# Altium PCB EsoCore_Edge.PcbDoc (part 1 of 6)
Units mil, origin at the board's own origin, x right, y up, seen from the top; angles counter-clockwise.
Board outline 6732.28 x 3385.83 mil, 4 copper layers (Top Layer, Layer 1, Layer 2, Bottom Layer), stack 61.58 mil thick; 330 components, 239 nets, 1236 pads, 712 vias.
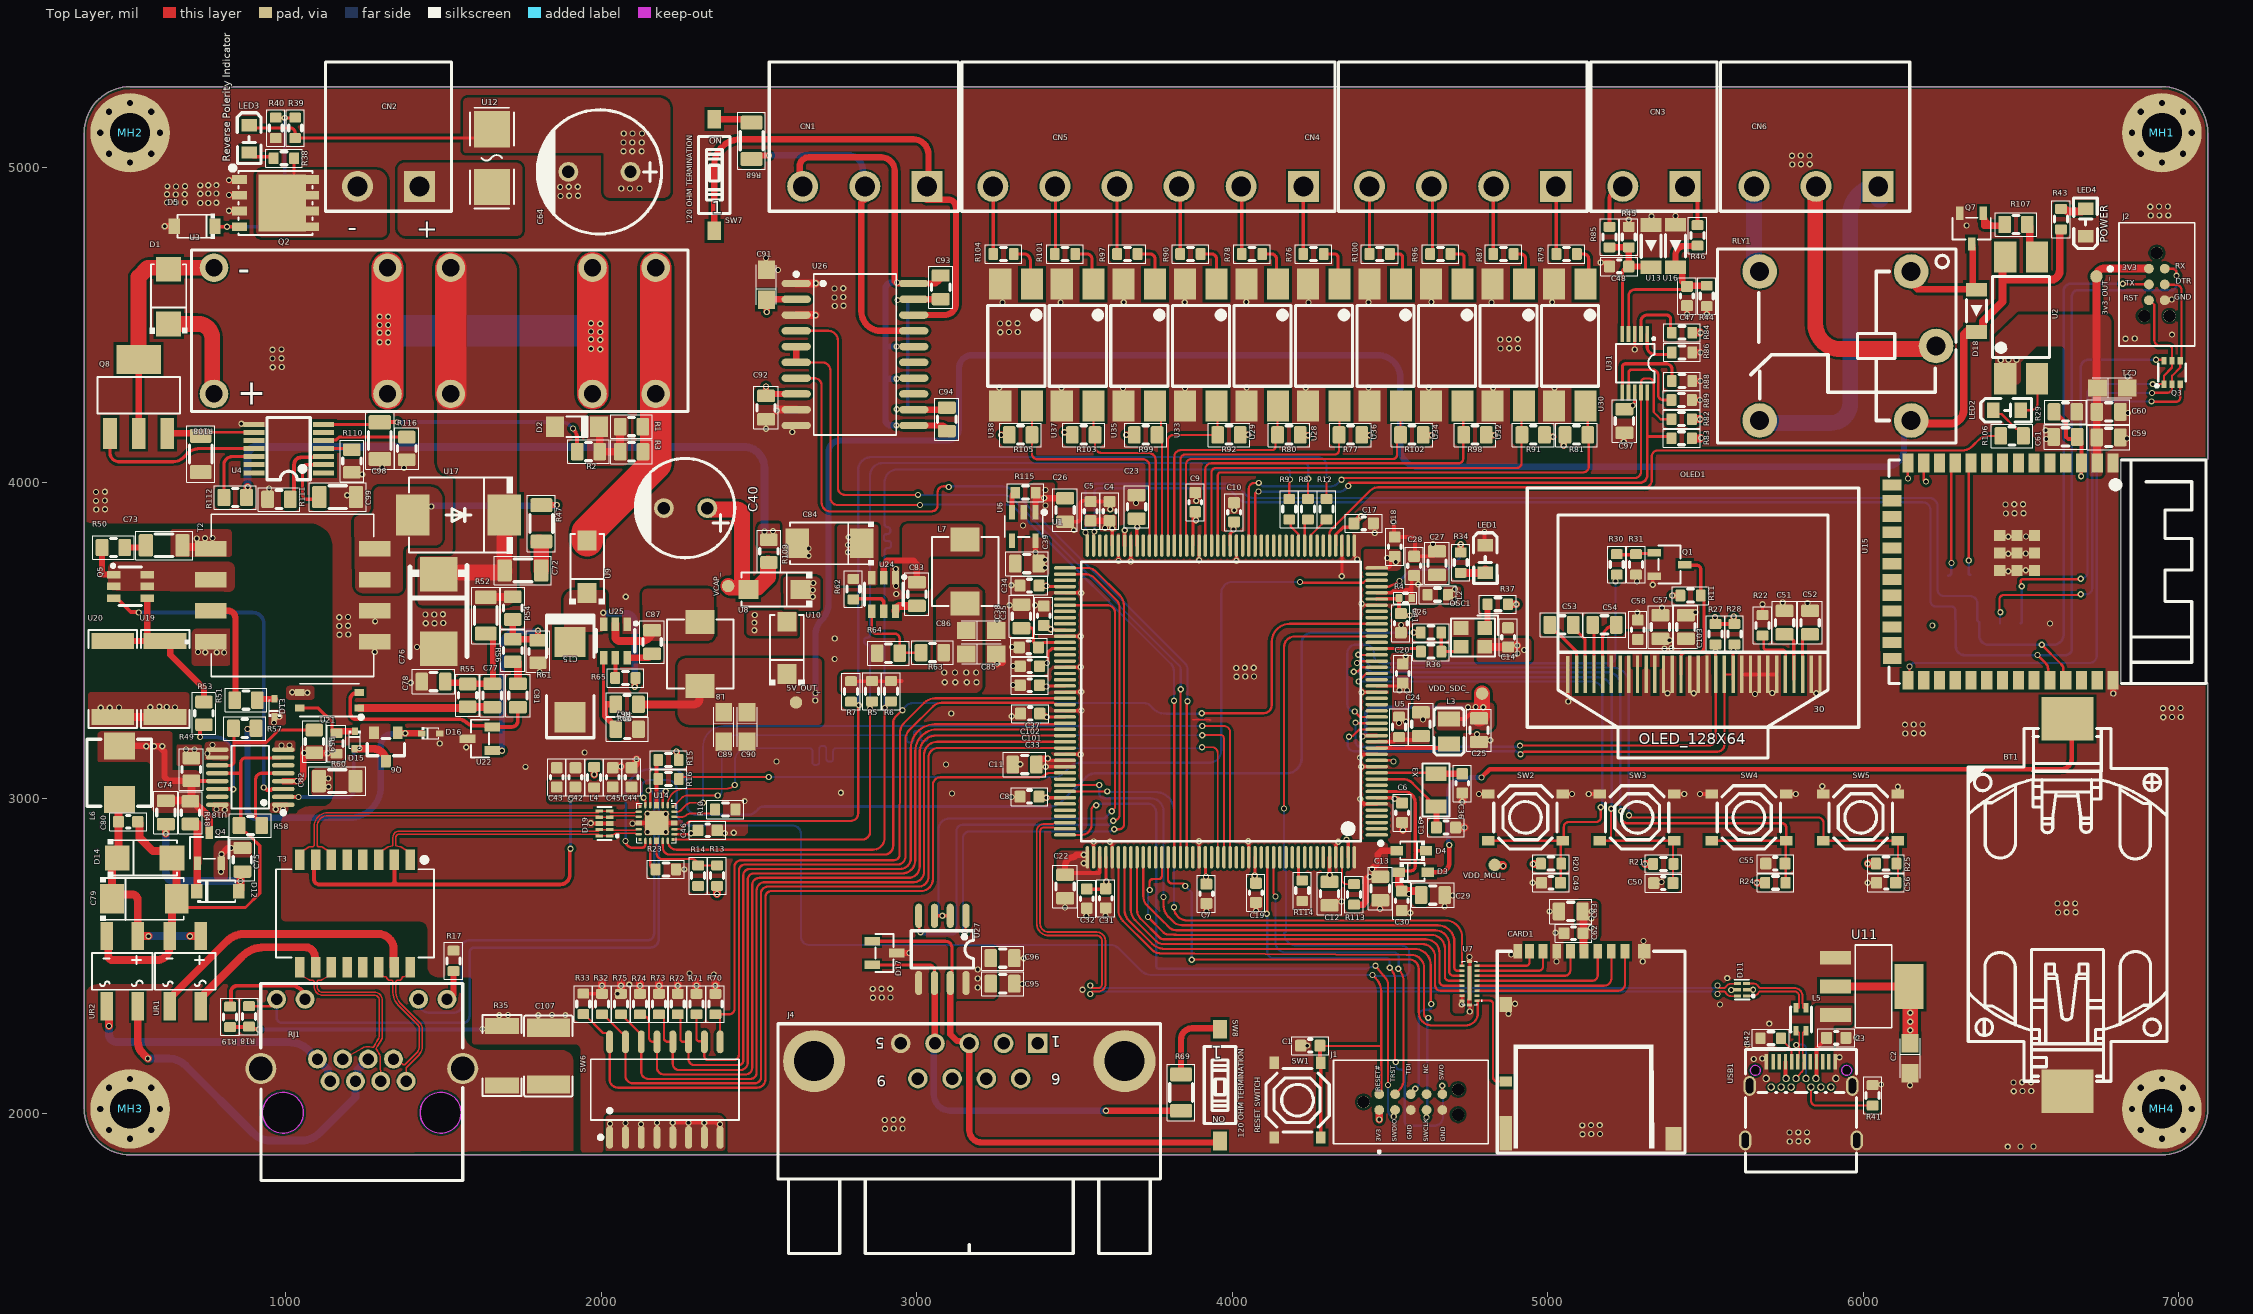
[diagram p0: Top Layer view]
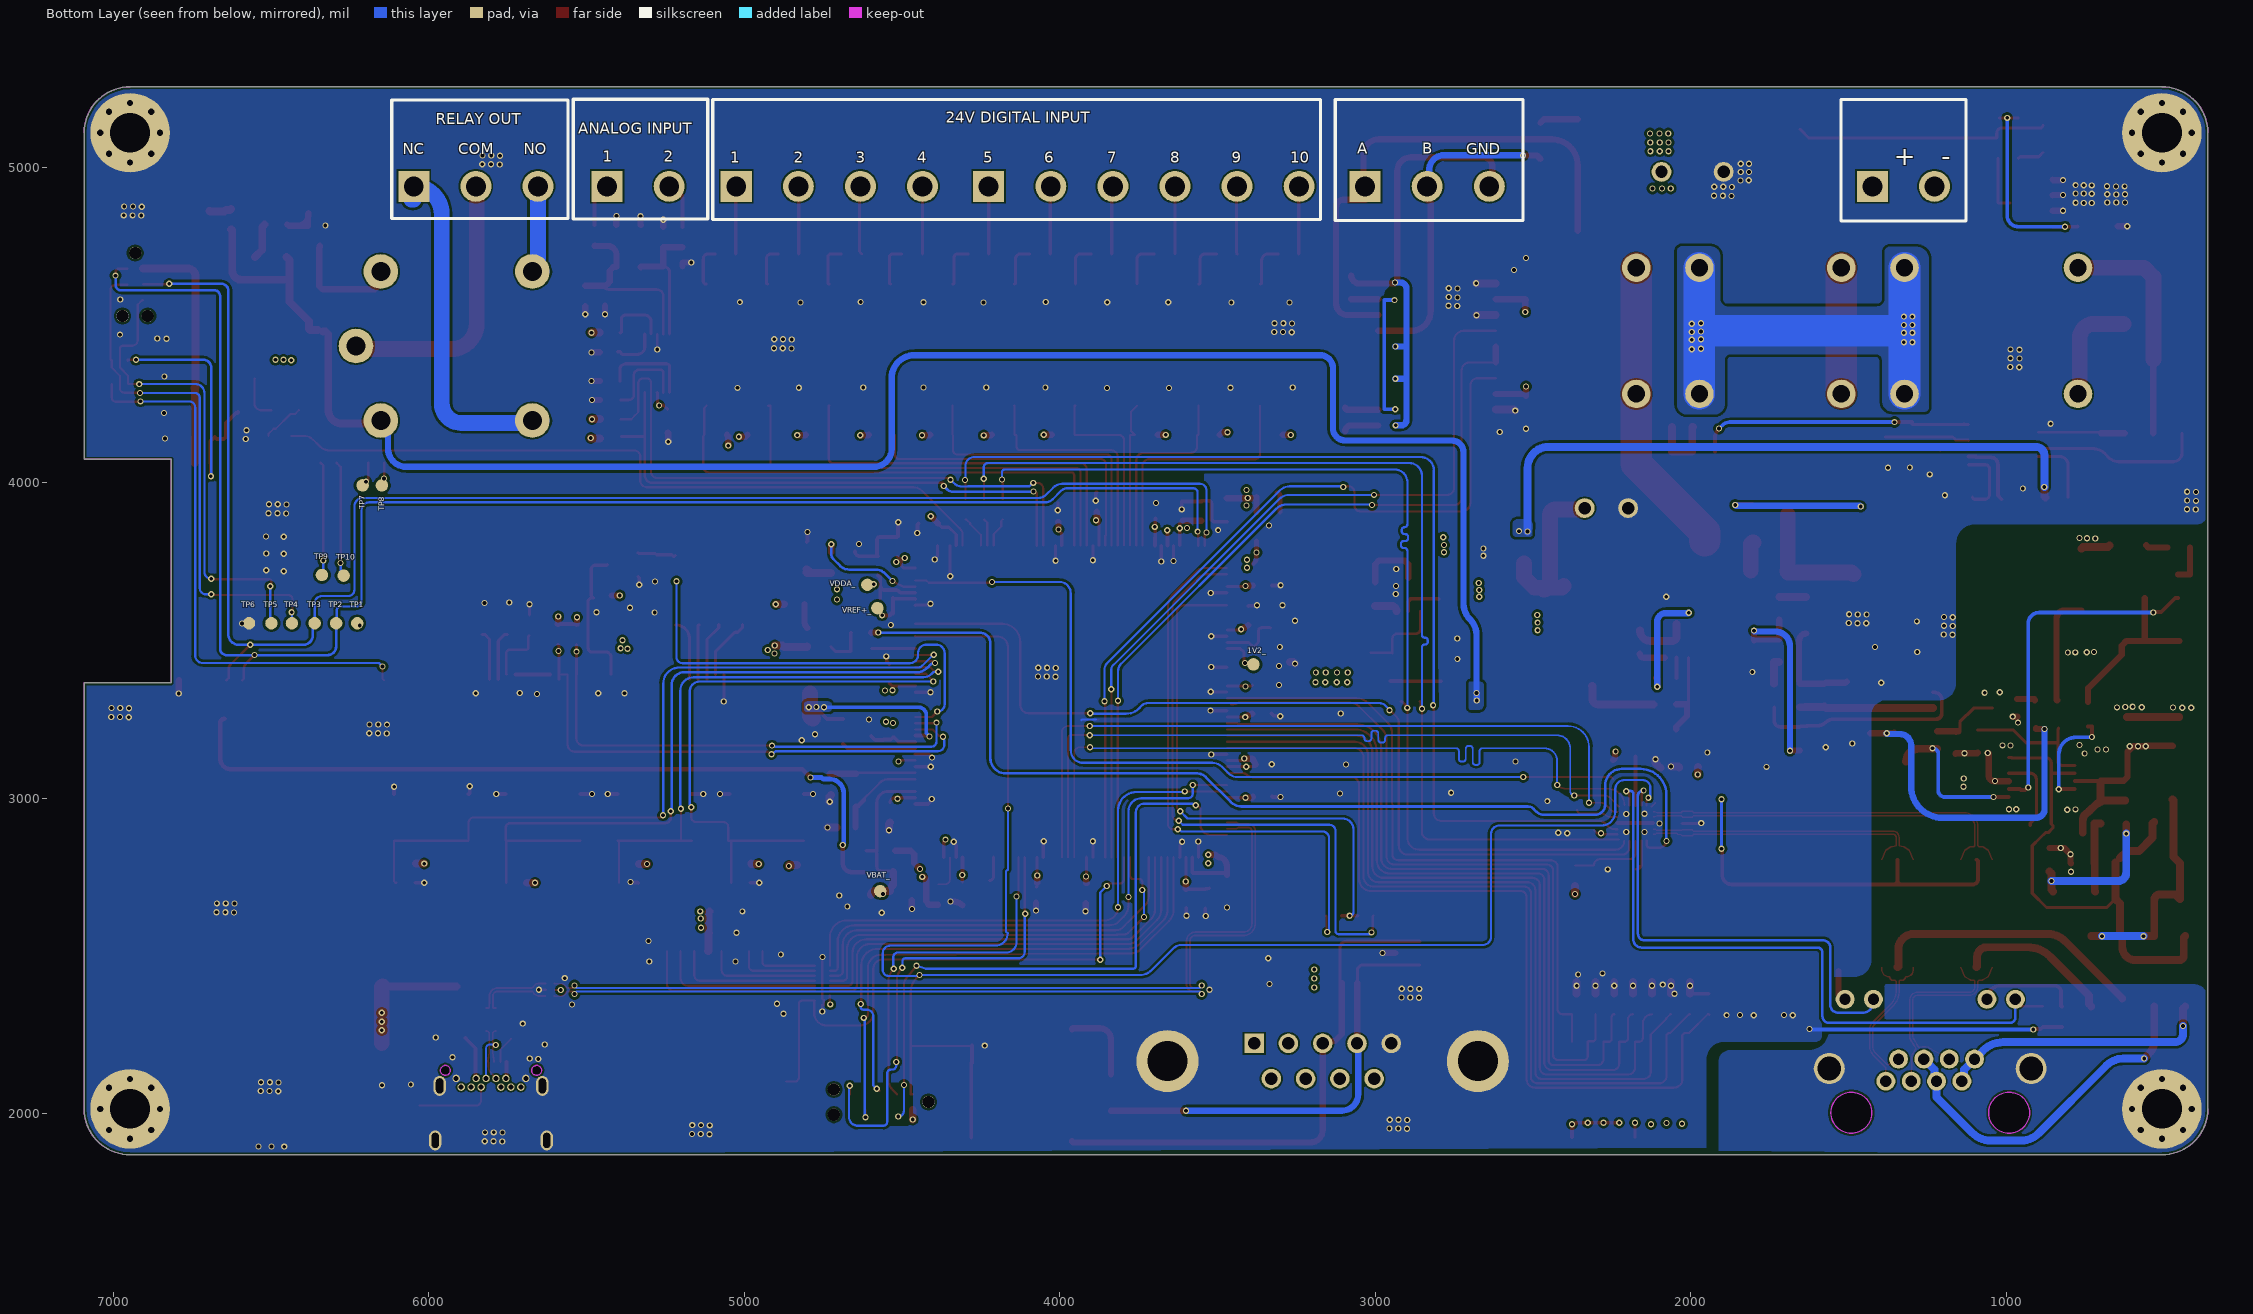
[diagram p1: Bottom Layer view, seen from below]
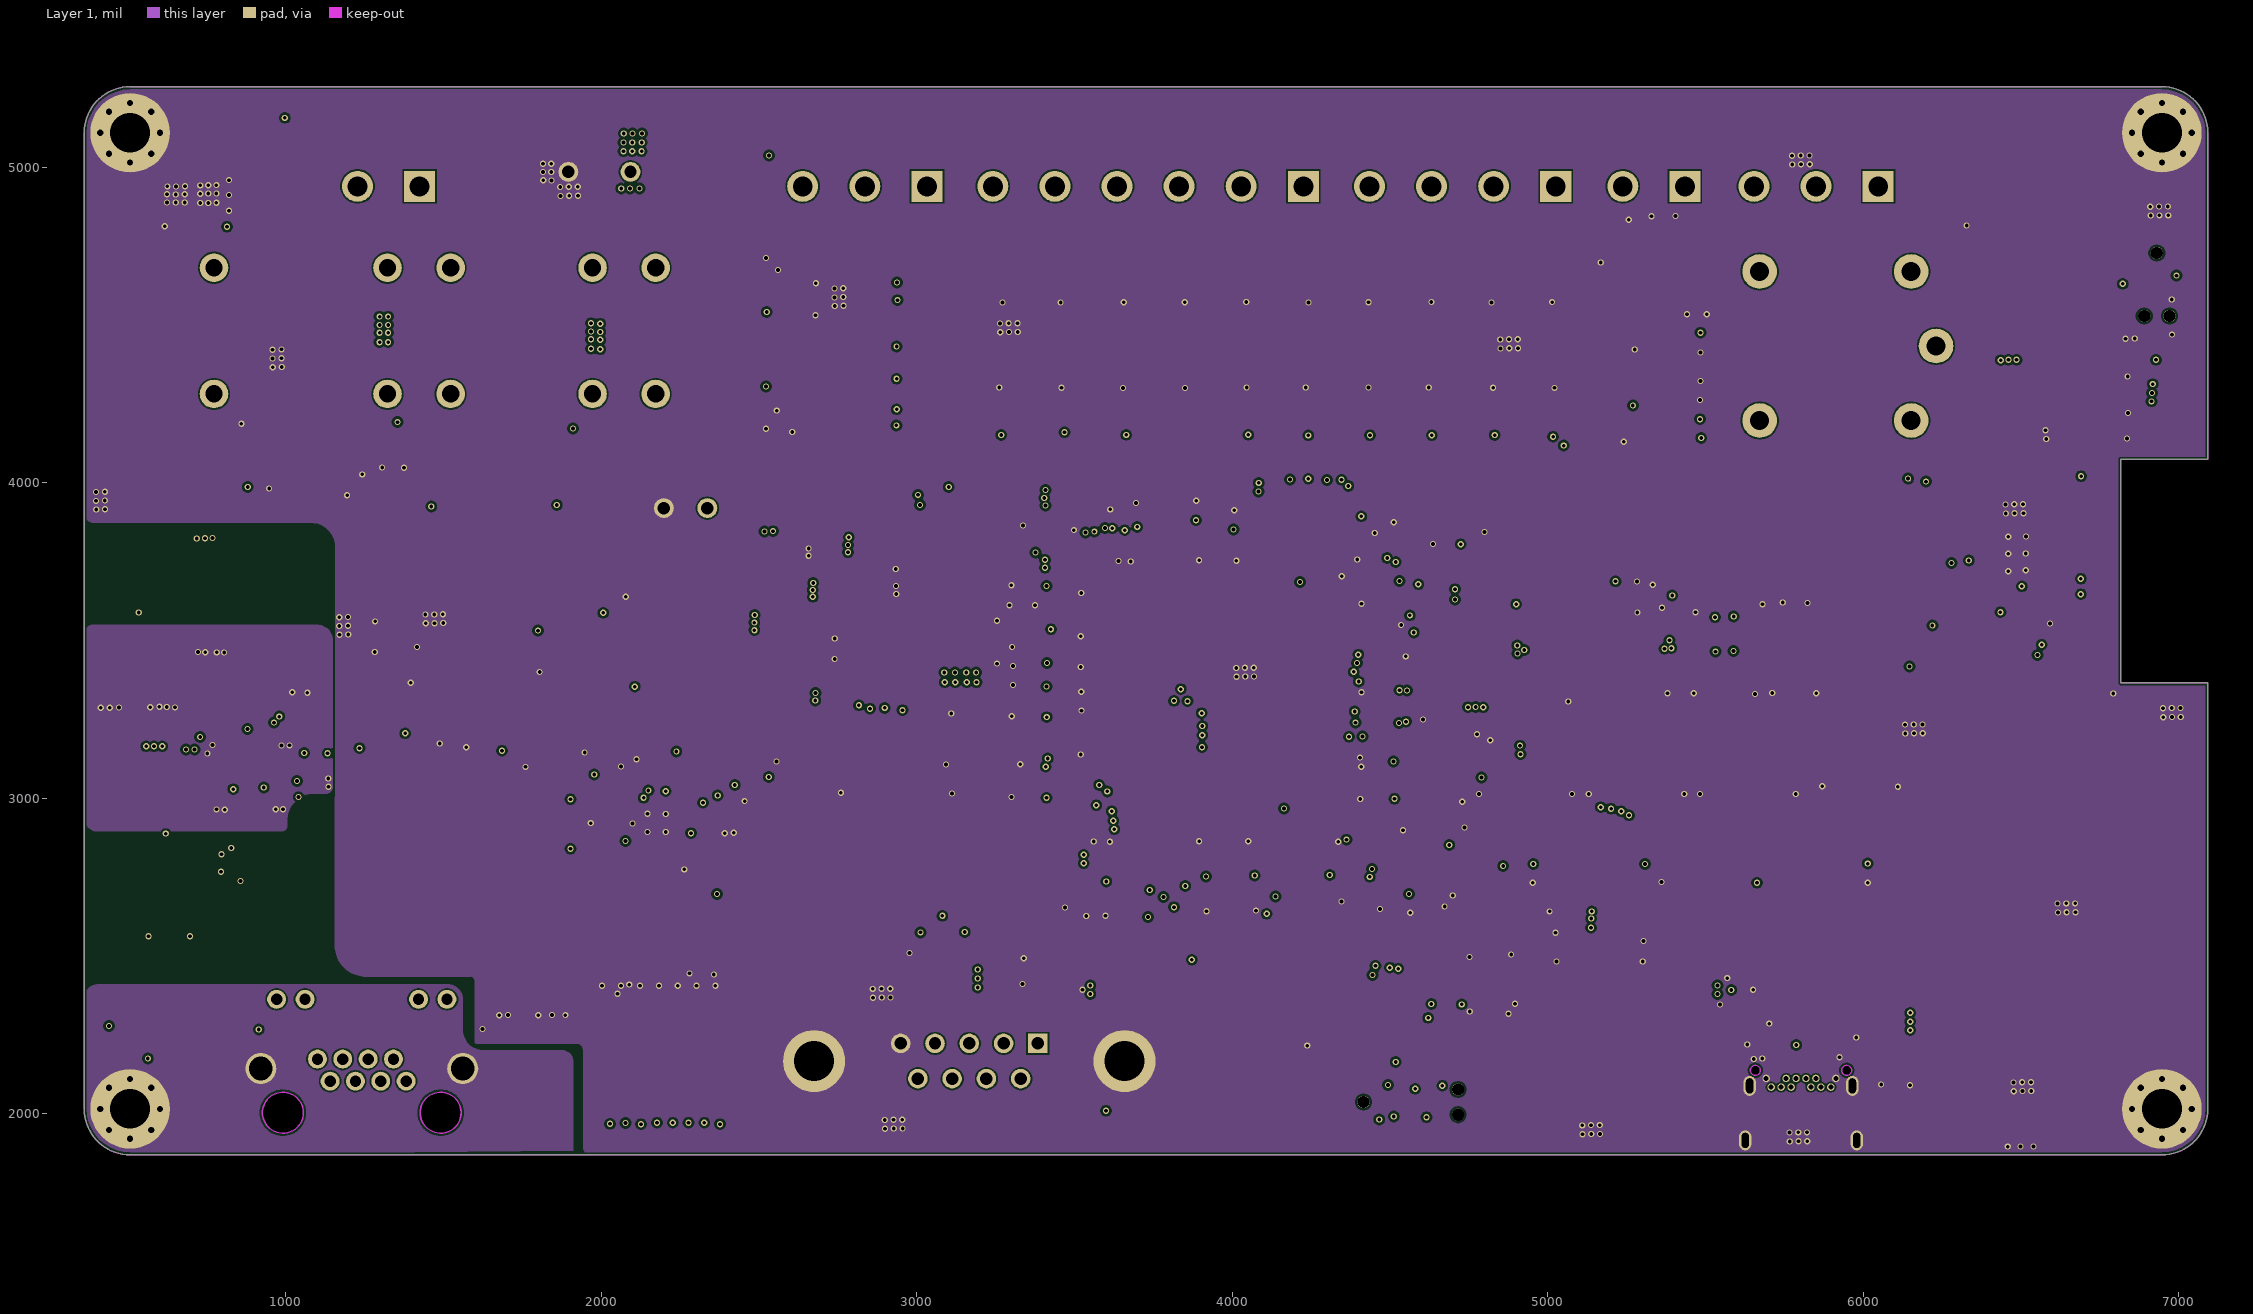
[diagram p2: Layer 1]
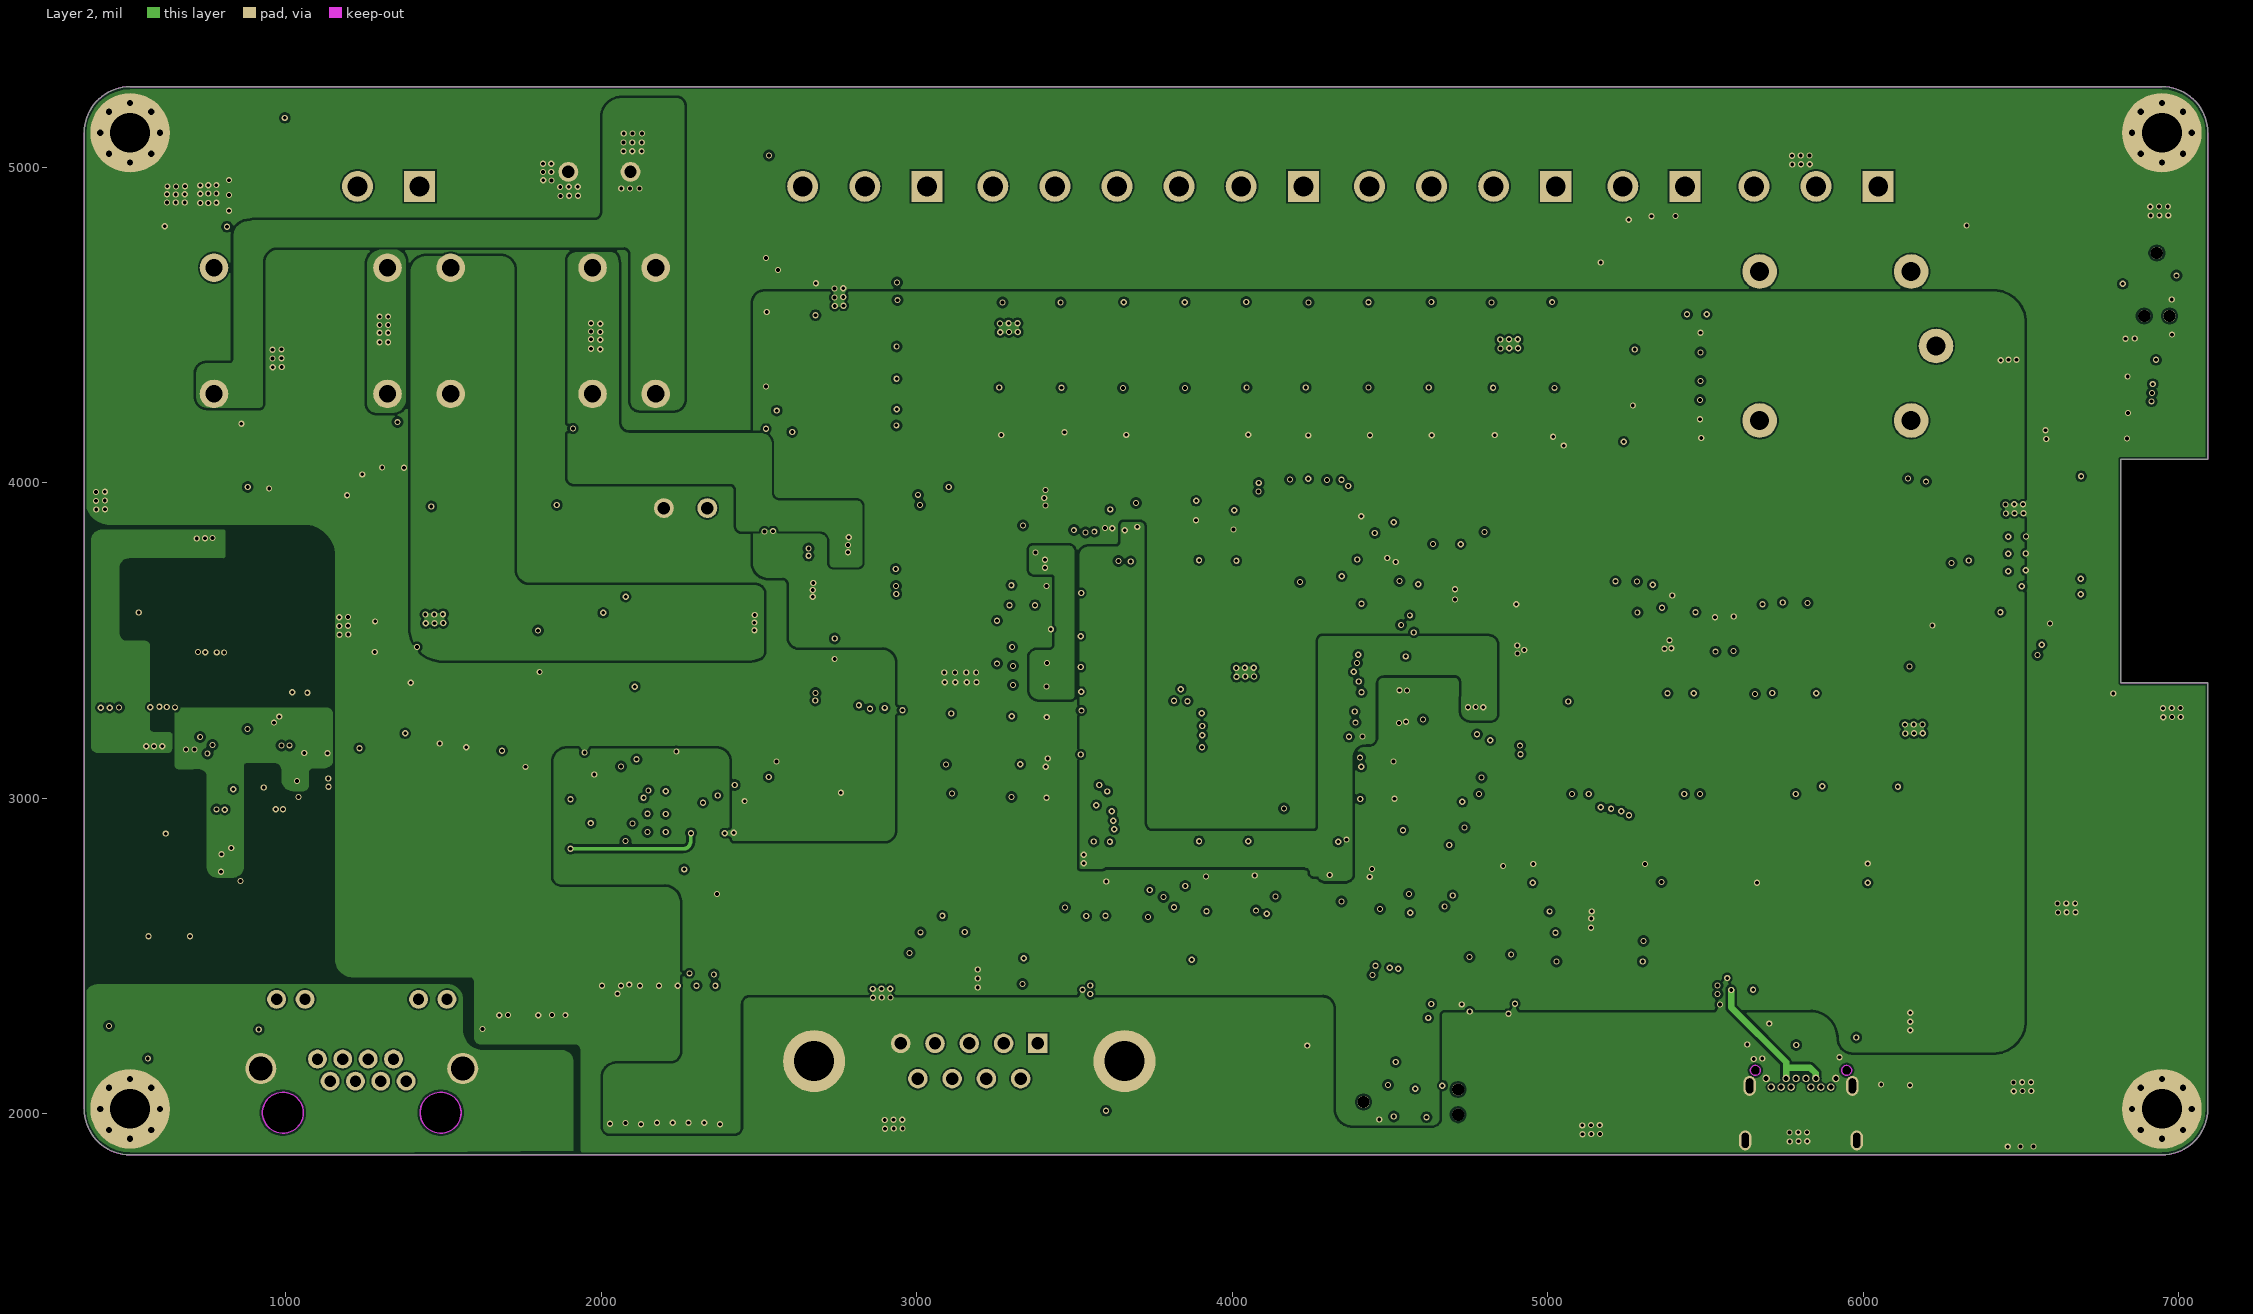
[diagram p3: Layer 2]
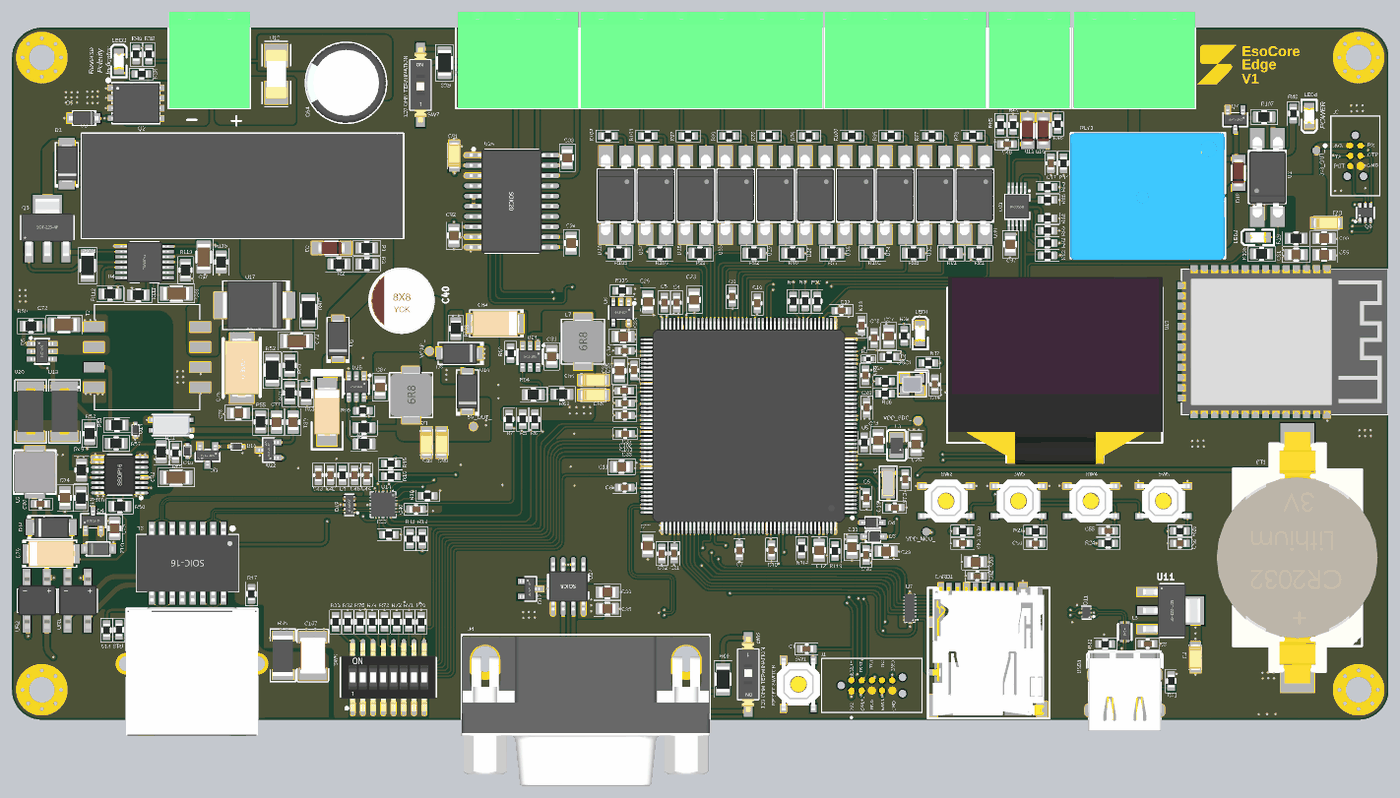
[diagram p8: 3D render of the assembled board from above, using the file's embedded part models]

## Layer stack, top to bottom
Top Solder: solder mask 0.4, Solder Resist, Dk 3.5
Top Layer: signal copper 1.38
Dielectric 2: prepreg 3.91, PP-006, Dk 4.1
Layer 1: signal copper 0.6
Dielectric 1: dielectric 49.8, FR-4, Dk 4.8
Layer 2: signal copper 0.6
Dielectric 3: prepreg 3.91, PP-006, Dk 4.1
Bottom Layer: signal copper 1.38
Bottom Solder: solder mask 0.4, Solder Resist, Dk 3.5

## Board outline
360.39,2015.51 360.39,5110 cw(c506.06,5110) 506.06,5255.67 6947,5255.67 cw(c6947,5110) 7092.67,5110 7092.67,4074.57 6817.08,4074.57 6817.08,3365.91 7092.67,3365.91 7092.67,2015.51 cw(c6947,2015.51) 6947,1869.84 506.06,1869.84 cw(c506.06,2015.51)

## Design rules (kind name [scope] priority, off if disabled: settings)
Clearance [All] p1: gap=7 ignorepadtopadclearanceinfootprint=TRUE except(5: Arc-Arc Arc-Track Track-Track THPad-Fill THPad-Poly THPad-Region; 8: Arc-Fill Arc-Poly Arc-Region Track-Fill Track-Poly Track-Region SMDPad-Fill SMDPad-Poly SMDPad-Region Via-Fill Via-Poly Via-Region Fill-Fill Fill-Poly Fill-Region Poly-Poly Poly-Region Region-Region)
ComponentClearance [All] p1: gap=10 collisioncheckmode=3 verticalgap=0 showdistances=FALSE donotcheckwithout3dbody=TRUE
DiffPairsRouting DiffPairsRouting_100 [InDifferentialPairClass('DIFF_100')] p1: maxlimit=5 minlimit=5 mostfreqgap=5 toplayer_minwidth=4.53 toplayer_maxwidth=4.53 toplayer_prefwidth=4.53 midlayer1_minwidth=3.11 midlayer1_maxwidth=3.11 midlayer1_prefwidth=3.11 midlayer2_minwidth=3.11 midlayer2_maxwidth=3.11 midlayer2_prefwidth=3.11 bottomlayer_minwidth=4.53 bottomlayer_maxwidth=4.53 bottomlayer_prefwidth=4.53 impedanceprofiledriven=TRUE impedanceprofileid={F4BAE591-1B0B-4594-972A-3B4D76FCA991} impedanceprofilevalue=100.000000 maxuncoupledlength=500
DiffPairsRouting DiffPairsRouting_90 [InDifferentialPairClass('USB_90')] p2: maxlimit=5 minlimit=5 mostfreqgap=5 toplayer_minwidth=5.86 toplayer_maxwidth=5.86 toplayer_prefwidth=5.86 midlayer1_minwidth=4.15 midlayer1_maxwidth=4.15 midlayer1_prefwidth=4.15 midlayer2_minwidth=4.15 midlayer2_maxwidth=4.15 midlayer2_prefwidth=4.15 bottomlayer_minwidth=5.86 bottomlayer_maxwidth=5.86 bottomlayer_prefwidth=5.86 impedanceprofiledriven=TRUE impedanceprofileid={0121417A-2B9E-4200-A5FA-08BD2ECC3B0E} impedanceprofilevalue=90.000000 maxuncoupledlength=500
HoleSize [All] p1: absolutevalues=TRUE maxlimit=2000 minlimit=1 maxpercent=80.000 minpercent=20.000
MinimumSolderMaskSliver [All] p1: minsoldermaskwidth=0
PlaneConnect [All] p1: planeconnectstyle=Direct reliefexpansion=20 reliefentries=4 reliefconductorwidth=10 reliefairgap=10
PolygonConnect [All] p1: connectstyle=Direct reliefconductorwidth=10 reliefentries=4 polygonreliefangle="90 Angle" airgapwidth=10
RoutingVias [All] p1: holewidth=11.81 width=19.68 viastyle="Through Hole" minholewidth=11.81 minwidth=19.68 maxholewidth=15.75 maxwidth=31.5
SilkToSilkClearance [All] p1: silktosilkclearance=0
SilkToSolderMaskClearance [IsPad] p1: minsilkscreentomaskgap=0 clearancetoexposedcopper=TRUE
SolderMaskExpansion SolderMaskExpansion_via [IsVia] p1: expansion=4 istentingtop=TRUE
SolderMaskExpansion [All] p2: expansion=4 istentingtop=FALSE
SupplyNets "Schematic Supply Nets_12" [InNet('+VIN2')] p1: voltage=0.000
SupplyNets "Schematic Supply Nets_10" [InNet('VBUS')] p2: voltage=0.000
SupplyNets "Schematic Supply Nets_8" [InNet('3V3')] p3: voltage=0.000
SupplyNets "Schematic Supply Nets_2" [InNet('GND_ISO')] p4: voltage=0.000
SupplyNets "Schematic Supply Nets_1" [InNet('VDD_ISO')] p5: voltage=0.000
SupplyNets "Schematic Supply Nets_23" [InNet('VDD_SDC')] p6: voltage=0.000
SupplyNets "Schematic Supply Nets_22" [InNet('1V2')] p7: voltage=0.000
SupplyNets "Schematic Supply Nets_21" [InNet('+24v')] p8: voltage=0.000
SupplyNets "Schematic Supply Nets_19" [InNet('EARTH_GND')] p9: voltage=0.000
SupplyNets "Schematic Supply Nets_6" [InNet('VDDA')] p10: voltage=0.000
SupplyNets "Schematic Supply Nets_4" [InNet('DSI_VDD12')] p11: voltage=0.000
SupplyNets "Schematic Supply Nets" [InNet('VBAT')] p12: voltage=0.000
SupplyNets "Schematic Supply Nets_18" [InNet('+VIN')] p13: voltage=0.000
SupplyNets "Schematic Supply Nets_11" [InNet('GND')] p14: voltage=0.000
SupplyNets "Schematic Supply Nets_7" [InNet('GND2')] p15: voltage=0.000
SupplyNets "Schematic Supply Nets_5" [InNet('+5V_OUT')] p16: voltage=0.000
SupplyNets "Schematic Supply Nets_3" [InNet('VREF+')] p17: voltage=0.000
Width [All] p1: maxlimit=200 minlimit=6 preferedwidth=7
23 further rules are at their usual default settings.

## Classes and differential pairs
differential pair class USB_90: D D1 USB
component class U_USB: C2 C3 D11 L5 R41 R42 U11 USB1
component class U_Tag: J1 J2
component class U_IO_ANALOG_DIGITAL: C47 C48 C97 CN3 CN4 CN5 CN6 D18 LED2 Q7 R44 R45 R46 R76 R77 R78 R79 R80 R81 R82 R83 R84 R85 R86 R87 R88 R89 R90 R91 R92 R96 R97 R98 R99 R100 R101 R102 R103 R104 R105 R106 R107 RLY1 U2 U13 U16 U28 U29 U30 U31 U32 U33 U34 U35 U36 U37 U38
component class U_FieldBUS_RTU: C91 C92 C93 C94 C95 C96 CN1 D17 J4 R32 R33 R68 R69 R70 R71 R72 R73 R74 R75 SW6 SW7 SW8 U26 U27
component class Root_page: MH1 MH2 MH3 MH4 U9 U10
component class U_MIcroSD_Card: C62 C63 CARD1 U7
component class U_24V_input: C64 CN2 D5 LED3 Q2 R38 R39 R40 U12
differential pair class DIFF_100: IRD ITD R RD T TD
component class U_UI: C49 C50 C51 C52 C53 C54 C55 C56 C57 C58 C103 OLED1 Q1 R11 R20 R21 R22 R24 R25 R27 R28 R30 R31 SW2 SW3 SW4 SW5
component class U_PROTECTION&SupplySwitching: C98 C99 D1 D2 Q8 R1 R2 R3 R108 R110 R111 R112 R116 U3 U4
component class U_POE: C72 C73 C74 C75 C76 C77 C78 C79 C80 C81 C82 D12 D13 D14 D15 D16 L6 Q4 Q5 Q6 R47 R48 R49 R50 R51 R52 R53 R54 R55 R56 R57 R58 R59 R60 R61 T2 U17 U18 U19 U20 U21 U22 UR1 UR2
component class U_MCU: 1V2_ BT1 C1 C4 C5 C6 C7 C8 C9 C10 C11 C12 C13 C14 C16 C17 C18 C19 C20 C22 C23 C24 C25 C26 C27 C28 C29 C30 C31 C32 C33 C34 C35 C36 C37 C38 C39 C41 C101 C102 D3 D4 L2 L3 LED1 OSC1 R4 R26 R34 R36 R37 R113 R114 R115 SW1 U1 U5 U6 VBAT_ VDD_MCU_ VDD_SDC_ VDDA_ VREF+_ X3
component class U_ETHERNET: C42 C43 C44 C45 C46 C107 D19 L4 R5 R6 R7 R8 R9 R10 R12 R13 R14 R15 R16 R17 R18 R19 R23 R35 RJ1 T3 U14
component class U_ESP32: C21 C59 C60 C61 Q3 R29 TP1 TP2 TP3 TP4 TP5 TP6 TP7 TP8 TP9 TP10 U15
component class U_Buck_converter: 3v3_OUT_ 5V_OUT_ C15 C40 C83 C84 C85 C86 C87 C89 C90 L7 L8 LED4 R43 R62 R63 R64 R65 R66 R67 R109 U8 U24 U25 VCAP_
differential pair USB: +USB_P -USB_N
differential pair D: +D_P -D_N
differential pair D1: +D1_P -D1_N
differential pair T: +T_P -T_N
differential pair R: +R_P -R_N
differential pair TD: +TD_P -TD_N
differential pair RD: +RD_P -RD_N

## Components (designator, comment, footprint, x,y, rotation, side; value= is the part's Value field where it differs from the comment)
1V2_ "TP" TP 3385.84,3424.58 r90 bottom
3v3_OUT_ "TP" TP 6739.54,4654.54 r180 top
5V_OUT_ "TP" TP 2617,3304 r90 top
BT1 "1060TR" BAT-SMD_1060TR 6648,2662 r180 top
C1 "100nF" C_0603 4249.23,2216.48 r180 top
C2 "22uF" CASE-A_3216 6149,2176 r270 top
C3 "100nF" C_0603 5913,2240 r0 top
C4 "100nF" C_0603 3611.48,3908.77 r90 top
C5 "100nF" C_0603 3551.48,3908.77 r90 top
C6 "100nF" C_0603 4538,2956 r270 top
C7 "100nF" C_0603 3917.52,2699.26 r270 top
C8 "100nF" C_0603 3359,3006 r180 top
C9 "100nF" C_0603 3883,3937 r90 top
C10 "100nF" C_0603 4006,3905 r90 top
C11 "1uF" C_0805 3343.62,3107.19 r0 top
C12 "4.7uF" C_0805 4308,2700 r90 top
C13 "4.7uF" C_0805 4469,2716 r90 top
C14 "10uF" C_0603 4874.9,3508.6 r90 top
C15 "10uF" CASE-C_6032 1901,3376 r90 top
C16 "18pF" C_0603 4676,2907 r0 top
C17 "100nF" C_0603 4415,3871 r0 top
C18 "100nF" C_0603 4515.48,3795.77 r90 top
C19 "100nF" C_0603 4074.52,2702.26 r270 top
C20 "100nF" C_0603 4541,3394 r90 top
C21 "22uF" CASE-A_3216 6790,4301 r0 top
C22 "4.7uF" C_0805 3469.81,2722.62 r90 top
C23 "4.7uF" C_0805 3697,3922 r270 top
C24 "4.7uF" C_0805 4598,3233 r270 top
C25 "10uF" C_0805 4782,3218 r90 top
C26 "10uF" C_0805 3470,3916 r90 top
C27 "1uF" C_0805 4649.19,3743.57 r270 top
C28 "100nF" C_0603 4577,3735.19 r90 top
C29 "1uF" C_0805 4634,2693 r180 top
C30 "100nF" C_0603 4537,2677 r270 top
C31 "100nF" C_0603 3598.27,2684.75 r270 top
C32 "100nF" C_0603 3538.27,2683.75 r270 top
C33 "100nF" C_0603 3361,3269 r180 top
C34 "100nF" C_0603 3359,3675 r180 top
C35 "100nF" C_0603 3403,3577 r90 top
C36 "18pF" C_0603 4728.82,3048.96 r270 top
C37 "100nF" C_0603 3357,3479 r180 top
C38 "2.2uF" C_0805 3331.73,3574.82 r270 top
C39 "4.7uF" C_0805 3351,3744 r0 top
C40 "20F" CAP-TH_BD8.0-P3.50-D0.6-FD 2267,3920 r180 top
C41 "100nF" C_0603 4534,3557 r270 top
C42 "100nF" C_0603 1918.26,3064.67 r90 top
C43 "100nF" C_0603 1859.26,3064.67 r90 top
C44 "470pF" C_0603 2095.11,3068.16 r270 top
C45 "100nF" C_0603 2036.59,3064.67 r90 top
C46 "100nF" C_0603 2335,2898.5 r0 top
C47 "22nF" C_0603 5442,4590.77 r90 top
C48 "22nF" C_0603 5224.8,4685.6 r0 top
C49 "100nF" C_0603 5008.77,2731.74 r0 top
C50 "100nF" C_0603 5365,2730.74 r0 top
C51 "4.7uF" C_0805 5751,3555 r270 top
C52 "2.2uF" C_0805 5832,3555 r270 top
C53 "1uF" C_0805 5045.62,3550.19 r0 top
C54 "1uF" C_0805 5182,3550 r0 top
C55 "100nF" C_0603 5720,2792.52 r0 top
C56 "100nF" C_0603 6071,2731.74 r0 top
C57 "1uF" C_0805 5357,3545 r90 top
C58 "100nF" C_0603 5285,3536.06 r270 top
C59 "10uF" C_0805 6776,4144 r180 top
C60 "100nF" C_0805 6776,4225 r180 top
C61 "100nF" C_0805 6643.26,4145.84 r0 top
C62 "100nF" C_0603 5083.41,2573 r180 top
C63 "2.2uF" C_0805 5075.02,2641.77 r0 top
C64 "470uF" CAP-TH_BD10.0-P5.00-D0.6-FD_1 1993.8,4985.9 r180 top
C72 "470pF" C_1206 1752,3722 r180 top
C73 "68pF" C_1206 613.26,3802.37 r0 top
C74 "1uF" C_0805 619,2957 r90 top
C75 "4.7uF" C_0805 862,2803 r270 top
C76 "330uF" CASE-D_7343 1484,3592 r90 top
C77 "33nF" C_0805 1654,3328 r90 top
C78 "1uF" C_0805 1470,3370 r0 top
C79 "4.7uF" CAP-SMD_L6.0-W3.2-R-RD 551,2681 r180 top
C80 "100nF" C_0603 498,2925 r0 top
C81 "27nF" C_0805 1735,3328 r90 top
C82 "2.2nF_AC_YCAP" C_1206 1162,3055 r0 top
C83 "100nF" C_0805 3000.19,3645.38 r270 top
C84 "4.7uF" CAP-SMD_L6.0-W3.2-R-RD 2723.36,3808 r0 top
C85 "22uF" CASE-A_3216 3204,3458 r0 top
C86 "22uF" CASE-A_3216 3204,3532 r0 top
C87 "100nF" C_0805 2161.19,3493.38 r270 top
C89 "22uF" CASE-A_3216 2387.9,3226.17 r270 top
C90 "22uF" CASE-A_3216 2461.9,3226.17 r270 top
C91 "22uF" CASE-A_3216 2523,4628.24 r90 top
C92 "100nF" C_0805 2521.81,4240.62 r90 top
C93 "100nF" C_0805 3076,4618 r270 top
C94 "100nF" C_0805 3094.81,4203.43 r90 top
C95 "100nF" C_0805 3270,2412 r180 top
C96 "100nF" C_0805 3270,2493 r180 top
C97 "100nF" C_0805 5243,4198 r90 top
C98 "10uF" C_1206 1297.41,4133.17 r90 top
C99 "4.7uF" C_1206 1164.78,3954.77 r180 top
C101 "100nF" C_0603 3360,3359 r180 top
C102 "100nF" C_0603 3360,3419 r180 top
C103 "10uF" C_0805 5438,3540.95 r270 top
C107 "4.7nF" C1812 1832,2183 r90 top
CARD1 "DM3AT-SF-PEJM5" SD-SMD_DM3AT-SF-PEJM5 5133,2218 r0 top locked
CN1 "XY2500R-A-5.00-3P" CONN-TH_XY2500R-A-5.00-3P 2835.15,4940 r180 top
CN2 "XY2500R-A-5.00-2P" CONN-TH_XY2500R-A-5.00-2P 1325.42,4940 r180 top
CN3 "XY2500R-A-5.00-2P" CONN-TH_XY2500R-A-5.00-2P 5336.42,4940 r180 top
CN4 "XY2500R-A-5.00-4P" CONN-TH_XY2500R-A-5.00-4P 4730.27,4940 r180 top
CN5 "XY2500R-A-5.00-6P" CONN-TH_XY2500R-A-5.00-6P 3733.13,4940 r180 top
CN6 "XY2500R-A-5.00-3P" CONN-TH_XY2500R-A-5.00-3P 5850.85,4940 r180 top
D1 "ES1D-E3/61T" SMA_L4.3-W2.6-LS5.2-RD 628,4590.61 r90 top
D2 "BZV55C2V0" SOD-80_L3.5-W1.5-RD 1923,4178 r180 top
D3 "BAT54WS-7-F" SOD-323_L1.8-W1.3-LS2.5-RD 4574,2766.01 r0 top
D4 "BAT54WS-7-F" SOD-323_L1.8-W1.3-LS2.5-RD 4568,2834 r180 top
D5 "MMSZ5245BT1G" SOD-123_L2.7-W1.6-LS3.7-RD 710.7,4813.4 r180 top
D11 "USBULC6-2M6" SON-6_L1.4-W1.0-P0.50-TL_USBULC6-2M6 5615.92,2393.25 r270 top
D12 "BZT52C8V2" SOD-123_L2.8-W1.8-LS3.7-RD 784,2705 r0 top
D13 "BAS516,115" SOD-523F_L1.2-W0.8-LS1.7-RD 964,3287 r90 top
D14 "SMAJ58A" SMA_L4.3-W2.6-LS5.2-RD 552,2811 r0 top
D15 "BAS516,115" SOD-523F_L1.2-W0.8-LS1.7-RD 1218.2,3185 r270 top
D16 "BAS516,115" SOD-523F_L1.2-W0.8-LS1.7-RD 1459,3206 r0 top
D17 "SP0502BAHTG" SOT-23-3_L2.9-W1.3-P1.90-LS2.4-BR 2897.37,2509.4 r180 top
D18 "LL4148" LL-34_L3.5-W1.5-RD 6359,4545 r90 top
D19 "TPD4E05U06DQAR" USON-10_L2.5-W1.0-P0.50-BL 2010.25,2920.35 r90 top
J1 "TC2050-IDC-NL" TAG-CONNECT_TC2050-IDC-NL 4466,2012 r90 top
J2 "TC2030-IDC-NL" TAG_TC2030-IDC-NL 6931,4629 r270 top
J4 "DS1037-09FNAKT74-0CC" DSUB-TH_DS1037-09FNAKT74-0CC 3166.34,2167.09 r270 top
L2 "FCM1608KF-601T03" R_0603 4651,3646 r0 top
L3 "2.2uH" L0806 4687,3212 r270 top
L4 "FCM1608KF-601T03" R_0603 1976.26,3066.17 r90 top
L5 "DLW21SN900SQ2L" FILTER-SMD_4P-L2.0-W1.2-BL_DLW21H 5803.2,2299.27 r0 top
L6 "3.3uH" IND-SMD_L5.4-W5.2_PSPMAA0503 472,3081 r90 top
L7 "6.8uH" IND-SMD_L5.4-W5.2_SLO0530H6R8MTT 3153,3719.5 r90 top
L8 "6.8uH" IND-SMD_L5.4-W5.2_SLO0530H6R8MTT 2313,3458 r90 top
LED1 "XL-2012UBC" LED0805-RD 4802.3,3758.99 r270 top
LED2 "YLED0805R" LED0805-RD_RED 6455.69,4230 r0 top
LED3 "YLED0805R" LED0805-RD_RED 883.3,5090.6 r270 top
LED4 "XL-2012UGC" LED0805-RD_GREEN 6705,4825.2 r90 top
MH1 "MH" MountingHole_3.2mm_M3_Pad_Via 6947,5110 r180 top locked
MH2 "MH" MountingHole_3.2mm_M3_Pad_Via 506.06,5110 r0 top
MH3 "MH" MountingHole_3.2mm_M3_Pad_Via 506.06,2015.51 r0 top
MH4 "MH" MountingHole_3.2mm_M3_Pad_Via 6947,2015.51 r0 top
OLED1 "N096-2864KSWEG01-H30" OLED-SMD_30P-0.96OLED 5458.47,3627.95 r0 top locked
OSC1 "25MHz" OSC-SMD_4P-L2.5-W2.0-BL 4763,3510.3 r180 top
Q1 "BSS138LT1G" SOT-23-3_L2.9-W1.6-P1.90-LS2.8-BR 5386,3741 r180 top
Q2 "XRS75N10F" PDFN-8_L5.8-W5.0-P1.27-LS6.1-BL 967,4887 r270 top
Q3 "UMH3N" SC-70-6_L2.2-W1.3-P0.65-LS2.1-BR 6979.41,4350.4 r270 top
Q4 "MMBTA42LT1G" SOT-23-3_L2.9-W1.6-P1.90-LS2.8-BR 757,2843 r270 top
Q5 "SI3440DV-VB" SOT-23-6_L2.9-W1.6-P0.95-LS2.8-BR 507,3672 r180 top
Q6 "2N7002LT1G" SOT-23_L2.9-W1.3-P1.90-LS2.4-BR 1317,3162.28 r90 top
Q7 "BC848A(RANGE:110-220)" SOT-23-3_L2.9-W1.6-P1.90-LS2.8-BR 6344,4806 r90 top
Q8 "DMN15H310SE-13" SOT-223-3_L6.5-W3.4-P2.30-LS7.0-BR 533,4274.07 r270 top
R1 "2.2kΩ" R_0805 2095,4177 r180 top
R2 "2.2kΩ" R_0805 1958.57,4097.9 r180 top
R3 "2.2kΩ" R_0805 2095.43,4097.72 r180 top
R4 "0Ω" R_0402 4548.92,3635.2 r0 top
R5 "10kΩ" R_0603 2858.74,3339.73 r270 top
R6 "10kΩ" R_0603 2918.74,3339.73 r270 top
R7 "10kΩ" R_0603 2792,3339 r270 top
R8 "33Ω" R_0603 4239.26,3916.23 r90 top
R9 "33Ω" R_0603 4180,3916.23 r90 top
R10 "10kΩ" R_0603 2392.6,2965.4 r0 top
R11 "10kΩ" R_0603 5453,3642 r180 top
R12 "33Ω" R_0603 4298,3916.23 r90 top
R13 "1.5kΩ" R_0603 2366,2754.5 r90 top
R14 "33Ω" R_0603 2306,2754.5 r90 top
R15 "10kΩ" R_0603 2212.5,3122.5 r0 top
R16 "33Ω" R_0603 2213,3060.5 r180 top
R17 "270Ω" R_0603 1532,2485 r270 top
R18 "10kΩ" R_0603 882.26,2308.27 r90 top
R19 "270Ω" R_0603 822,2307 r90 top
R20 "10kΩ" R_0603 5010.27,2793.74 r0 top
R21 "10kΩ" R_0603 5366.5,2792.74 r0 top
R22 "910kΩ" R_0603 5681.74,3548.73 r270 top
R23 "6.49k" R_0603 2204,2775.5 r0 top
R24 "10kΩ" R_0603 5721.5,2732.96 r0 top
R25 "10kΩ" R_0603 6072.5,2793.74 r0 top
R26 "51Ω" R_0603 4630.3,3524.6 r180 top
R27 "4.7kΩ" R_0603 5531,3520 r90 top
R28 "4.7kΩ" R_0603 5591,3520 r90 top
R29 "10kΩ" R_0805 6641.57,4226.1 r0 top
R30 "1kΩ" R_0603 5219.74,3741.73 r270 top
R31 "10kΩ" R_0603 5280.74,3741.73 r270 top
R32 "10kΩ" R_0603 2001.38,2347.62 r90 top
R33 "10kΩ" R_0603 1942,2348 r90 top
R34 "22Ω" R_0603 4723.5,3747 r90 top
R35 "1MΩ" R2010 1685,2184.28 r270 top
R36 "51Ω" R_0603 4629.9,3465.8 r0 top
R37 "10kΩ" R_0603 4841.97,3614.56 r180 top
R38 "10kΩ" R_0603 993.3,5029.7 r0 top
R39 "5.6kΩ" R_0603 1030.1,5125.5 r270 top
R40 "10kΩ" R_0603 968.5,5125.5 r270 top
R41 "5.1kΩ" R_0603 6029.2,2058.09 r90 top
R42 "5.1kΩ" R_0603 5707,2240 r0 top
R43 "220Ω" R_0603 6627.94,4836.05 r270 top
R44 "5kΩ" R_0603 5503.26,4592.27 r90 top
R45 "5kΩ" R_0603 5257.8,4779.34 r270 top
R46 "10kΩ" R_0603 5474.26,4784.23 r90 top
R47 "10Ω" R_1206 1809.33,3871.45 r270 top
R48 "220kΩ" R_0805 696,2955 r90 top
R49 "220kΩ" R_0805 701,3091 r270 top
R50 "100Ω" R_0805 452.57,3793.9 r180 top
R51 "510Ω" R_0805 873,3310 r180 top
R52 "470Ω" R_1206 1634,3580 r90 top
R53 "4.7kΩ" R_0805 739,3270 r90 top
R54 "100kΩ" R_0805 1717.9,3603.43 r90 top
R55 "1kΩ" R_0805 1575,3327 r90 top
R56 "47kΩ" R_0805 1718,3469 r90 top
R57 "10kΩ" R_0805 870,3223 r0 top
R58 "45.3Ω" R_0805 887.75,2914.76 r0 top
R59 "100kΩ" R_0805 1089,3181 r90 top
R60 "6.8kΩ" R_0603 1161,3174 r270 top
R61 "33.2kΩ" R_0805 1798,3466 r90 top
R62 "10kΩ" R_0603 2798,3663 r90 top
R63 "56kΩ" R_0805 3050,3463 r0 top
R64 "12.4kΩ" R_0805 2910.57,3461.1 r0 top
R65 "10kΩ" R_0603 2076,3382 r0 top
R66 "100kΩ" R_0805 2082,3299 r0 top
R67 "13.7kΩ" R_0805 2081.43,3217.9 r180 top
R68 "120Ω" R_1206 2475.43,5084.25 r270 top
R69 "120Ω" R_1206 3837,2067 r270 top
R70 "10kΩ" R_0603 2360.64,2347.62 r90 top
R71 "10kΩ" R_0603 2300.64,2347.62 r90 top
R72 "10kΩ" R_0603 2241.38,2347.62 r90 top
R73 "10kΩ" R_0603 2181.64,2347.62 r90 top
R74 "10kΩ" R_0603 2121.38,2347.62 r90 top
R75 "10kΩ" R_0603 2061.38,2347.62 r90 top
R76 "2.4kΩ" R_0603 4257.73,4725 r180 top
R77 "10kΩ" R_0805 4375,4153.19 r0 top
R78 "2.4kΩ" R_0603 4062.73,4725 r180 top
R79 "2.4kΩ" R_0603 5060,4725 r180 top
R80 "10kΩ" R_0805 4180,4153.19 r0 top
R81 "10kΩ" R_0805 5090.43,4150.99 r180 top
R82 "10kΩ" R_0603 5424.5,4202.74 r0 top
R83 "10kΩ" R_0603 5424.5,4142 r0 top
R84 "10kΩ" R_0603 5425.5,4476.88 r0 top
R85 "10kΩ" R_0603 5195.06,4778.84 r90 top
R86 "10kΩ" R_0603 5426,4412.89 r180 top
R87 "2.4kΩ" R_0603 4860,4725 r180 top
R88 "10kΩ" R_0603 5426,4322 r180 top
R89 "10kΩ" R_0603 5425,4262 r180 top
R90 "2.4kΩ" R_0603 3867.73,4725 r180 top
R91 "10kΩ" R_0805 4954.57,4153.19 r0 top
R92 "10kΩ" R_0805 3990,4153.19 r0 top
R96 "2.4kΩ" R_0603 4660,4725 r180 top
R97 "2.4kΩ" R_0603 3667.73,4725 r180 top
R98 "10kΩ" R_0805 4770,4153.19 r0 top
R99 "10kΩ" R_0805 3725,4150.99 r180 top
R100 "2.4kΩ" R_0603 4467.73,4725 r180 top
R101 "2.4kΩ" R_0603 3470,4725 r180 top
R102 "10kΩ" R_0805 4570,4153.19 r0 top
R103 "10kΩ" R_0805 3528.57,4150.99 r180 top
R104 "2.4kΩ" R_0603 3275,4725 r180 top
R105 "10kΩ" R_0805 3328.57,4150.99 r180 top
R106 "100Ω" R_0805 6472.57,4150.1 r0 top
R107 "510Ω" R_0805 6484,4818 r180 top
R108 "1R" R_1206 730.57,4091.75 r90 top
R109 "680R" R_0805 2530,3784 r90 top value=13.7kΩ
R110 "510kΩ" R_0805 1207.78,4069.77 r90 top
R111 "240kΩ" R_0805 978.35,3948.87 r0 top
R112 "10kΩ" R_0805 839.78,3954.77 r0 top
R113 "10kΩ" R_0603 4385,2695 r90 top
R114 "10kΩ" R_0603 4221,2707 r90 top
R115 "10kΩ" R_0603 3344.77,3968.26 r180 top
R116 "68k" R_0805 1381.78,4109.77 r90 top
RJ1 "R-RJ45R08P-C000" RJ45-TH_R-RJ45R08P-C000 1240.45,2233.03 r0 top locked
RLY1 "SRD-05VDC-SL-C" RELAY-TH_SRD-XXVDC-XL-C 5951.47,4434 r180 top
SW1 "TS-1187A-B-A-B" SW-SMD_4P-L5.1-W5.1-P3.70-LS6.5-TL_H1.5 4207,2043 r270 top
SW2 "TS-1187A-B-A-B" SW-SMD_4P-L5.1-W5.1-P3.70-LS6.5-TL_H1.5 4929.15,2939.63 r180 top
SW3 "TS-1187A-B-A-B" SW-SMD_4P-L5.1-W5.1-P3.70-LS6.5-TL_H1.5 5283.49,2939.63 r180 top
SW4 "TS-1187A-B-A-B" SW-SMD_4P-L5.1-W5.1-P3.70-LS6.5-TL_H1.5 5637.82,2939.63 r180 top
SW5 "TS-1187A-B-A-B" SW-SMD_4P-L5.1-W5.1-P3.70-LS6.5-TL_H1.5 5992.15,2939.63 r180 top
SW6 "DSHP08TS-S" SW-SMD_DSHP08TS-S 2201.38,2076.62 r0 top
SW7 "DSIC01LS-P" SW-SMD_2P-L3.5-W6.1-P2.54-LS9.8 2358,4976 r90 top
SW8 "DSIC01LS-P" SW-SMD_2P-L3.5-W6.1-P2.54-LS9.8 3961,2091 r270 top
T2 "PA1134NL" XFMR_PA1134NL 1021.04,3643.64 r180 top
T3 "H1102NLT" XFMR-SMD_H1102NLT 1219,2635 r180 top
TP1 "TP" TP 6227,3555 r90 bottom
TP2 "TP" TP 6294,3555 r90 bottom
TP3 "TP" TP 6362,3555 r90 bottom
TP4 "TP" TP 6434,3555 r90 bottom
TP5 "TP" TP 6499,3555 r90 bottom
TP6 "TP" TP 6570,3555 r90 bottom
TP7 "TP" TP 6210,3992 r180 bottom net-tie
TP8 "TP" TP 6149,3992 r270 bottom net-tie
TP9 "TP" TP 6339,3708 r270 bottom net-tie
TP10 "TP" TP 6270,3706 r270 bottom net-tie
U1 "STM32H747IIT6" LQFP-176_L24.0-W24.0-P0.50-LS26.0-BL 3963.84,3307.09 r90 top locked
U2 "PC817X2NIPW" SOP-4_L6.5-W4.6-P2.54-LS10.0 6501,4523 r0 top
U3 "G7SA-2A2B DC24" RELAY-TH_G7SA-2A2B 1472,4482 r0 top
U4 "DRV110APWR" TSSOP-14_L5.0-W4.4-P0.65-LS6.4-BL 1008.78,4108.77 r90 top
U5 "ferrite_bead" L_0603 4528,3226 r90 top
U6 "TLV70212DBVR" SOT-23-5_L3.0-W1.7-P0.95-LS2.8-BL 3339,3862 r180 top
U7 "EMIF06-MSD02N16" QFN-16L_L3.5-W1.2-P0.40_EMIF06-MSD02N16 4752.25,2413.81 r90 top
U8 "CDBA240LL-HF" SMA_L4.4-W2.5-LS5.2-R-RD 2548.82,3662 r180 top
U9 "CDBA240LL-HF" SMA_L4.4-W2.5-LS5.2-R-RD 1955,3734 r90 top
U10 "CDBA240LL-HF" SMA_L4.4-W2.5-LS5.2-R-RD 2588,3477 r90 top
U11 "AMS1117-3.3" SOT-223-3_L6.5-W3.4-P2.30-LS7.0-BR 6028.93,2403.55 r180 top
U12 "0452005.MRL" FUSE-SMD_L6.1-W2.7 1653,5029.27 r90 top
U13 "ZMM3V3" LL-34_L3.5-W1.5-RD 5327.8,4750.53 r90 top
U14 "DP83825IRMQR" HVQFN-24_L3.0-W3.0-P0.40-TL-EP1.9 2175.16,2921.67 r270 top
U15 "ESP32-S3-WROOM-1-N16R8" WIRELM-SMD_ESP32-S3-WROOM-1 6441.81,3718.51 r270 top locked
U16 "ZMM3V3" LL-34_L3.5-W1.5-RD 5405,4751 r90 top
U17 "SS84" SMC_L6.9-W5.9-LS7.9-RD 1547,3898 r180 top
U18 "LTC4267CGN-3#PBF" SSOP-16_L4.9-W3.9-P0.64-LS6.0-BL 887,3067 r90 top
U19 "250mΩ" R2512 617,3378.28 r90 top
U20 "250mΩ" R2512 451,3378.28 r90 top
U21 "PS2911-1-F3-AX" OPTO-SMD_PS2911-1-F3-AX 1138,3311 r90 top
U22 "TLV431BQDBZR" SOT-23-3_L2.9-W1.3-P0.95-LS2.4-BR 1615,3189 r0 top
U24 "LMR51430XDDCR" SOT-23-6_L2.9-W1.6-P0.95-LS2.8-BR 2895,3646.15 r90 top
U25 "LMR51430XDDCR" SOT-23-6_L2.9-W1.6-P0.95-LS2.8-BR 2044.6,3499.15 r90 top
U26 "ADM2582EBRWZ" SOIC-20_L13.0-W7.6-P1.27-LS10.3-BL 2804,4407 r270 top
U27 "SN65HVD1176DR" SOIC-8_L5.0-W4.0-P1.27-LS6.0-BL 3081,2521 r180 top
U28 "PC817X2NIPW" SOP-4_L6.5-W4.6-P2.54-LS10.0 4290,4437.09 r180 top
U29 "PC817X2NIPW" SOP-4_L6.5-W4.6-P2.54-LS10.0 4095,4437.09 r180 top
U30 "PC817X2NIPW" SOP-4_L6.5-W4.6-P2.54-LS10.0 5070,4437.09 r180 top
U31 "ADS1115IDGST" VSSOP-10_L3.0-W3.0-P0.50-LS4.9-BL 5276,4379 r180 top
U32 "PC817X2NIPW" SOP-4_L6.5-W4.6-P2.54-LS10.0 4875,4437.09 r180 top
U33 "PC817X2NIPW" SOP-4_L6.5-W4.6-P2.54-LS10.0 3900,4437.09 r180 top
U34 "PC817X2NIPW" SOP-4_L6.5-W4.6-P2.54-LS10.0 4680,4437.09 r180 top
U35 "PC817X2NIPW" SOP-4_L6.5-W4.6-P2.54-LS10.0 3705,4437.09 r180 top
U36 "PC817X2NIPW" SOP-4_L6.5-W4.6-P2.54-LS10.0 4485,4437.09 r180 top
U37 "PC817X2NIPW" SOP-4_L6.5-W4.6-P2.54-LS10.0 3510,4437.09 r180 top
U38 "PC817X2NIPW" SOP-4_L6.5-W4.6-P2.54-LS10.0 3315,4437.09 r180 top
UR1 "HD01-T" MBS_L4.7-W4.0-P2.50-LS7.0-TL 680.85,2452.16 r90 top
UR2 "HD01-T" MBS_L4.7-W4.0-P2.50-LS7.0-TL 481.07,2452.16 r90 top
USB1 "TYPE-C 24P QCHT" TYPE-C-SMD_TYPE-C-24P-QCHT 5802.94,2039.86 r0 top locked
VBAT_ "TP" TP 4569.09,2705.77 r90 bottom
VCAP_ "TP" TP 2402,3673 r90 top
VDD_MCU_ "TP" TP 4832,2789 r90 top
VDD_SDC_ "TP" TP 4792,3332 r90 top
VDDA_ "TP" TP 4610,3677 r90 bottom
VREF+_ "TP" TP 4578,3603 r90 bottom
X3 "32.768kHz" OSC-SMD_2P-L3.2-W1.5 4646,3026 r90 top

## Footprints (in the part's own frame and the unit in brackets; to place one, negate y for a bottom-side part, rotate by r counter-clockwise, add the part's x,y. Pads: shape width x height; smd on the part's side, far side on the other; paste and mask are expansions set on the pad)
BAT-SMD_1060TR [mm]
  rect 4.2x3.5 smd: 1(0,-14.988) 2(0,14.988)
  silkscreen extent -8,-14.2 8,14.2, body extent -9.96,-15.65 10.03,15.65, height 5.6
C1812 [mm]
  rect 1.485x3.456 smd paste-100 mask+0.051: 1(-2.293,0) 2(2.293,0)
  silkscreen extent -3.26,-1.96 3.26,1.96, body extent -2.25,-1.6 2.25,1.6, height 2.6
C_0603 [mm]
  rrect25% 0.9x0.95 smd mask+0: 1(-0.731,0.012) 2(0.819,0.012)
  silkscreen extent -1.44,-0.72 1.52,0.74, body extent -0.74,-0.39 0.86,0.41, height 0.8
C_0805 [mm]
  rrect25% 1x1.45 smd mask+0: 1(-1.001,-0.005) 2(0.899,-0.005)
  silkscreen extent -1.75,-0.98 1.65,0.98, body extent -1.05,-0.63 0.95,0.62, height 1.25
C_1206 [mm]
  rrect22% 1.15x1.8 smd mask+0: 1(-1.458,-0.009) 2(1.492,-0.009)
  silkscreen extent -2.28,-1.16 2.32,1.14, body extent -1.58,-0.81 1.62,0.79, height 1.6
CAP-SMD_L6.0-W3.2-R-RD [mm]
  rect 1.9x2.376 smd: 1(2.6,0) 2(-2.6,0)
  silkscreen extent -3.18,-1.75 3.56,1.75, body extent -3,-1.6 3,1.6, height 2.8
CAP-TH_BD8.0-P3.50-D0.6-FD [mm]
  round 1.6 hole 1: 1(-1.75,0) 2(1.75,0)
  silkscreen extent -3.96,-4 4.04,4, body extent -4,-4 4,4, height 8
CAP-TH_BD10.0-P5.00-D0.6-FD_1 [mm]
  round 1.6 hole 1 paste-2539.97 mask+0.05: 1(-2.5,0) 2(2.5,0)
  silkscreen extent -5,-5 5.08,5, body extent -5.01,-4.99 5,4.99, height 12.41
CASE-A_3216 [mil]
  rect 59.05x53.5 smd: 1(-47.24,0) 2(47.24,0)
  silkscreen extent -63,-32 63,32, body extent -61,-32 65,31, height 67
CASE-C_6032 [mil]
  rect 95.5x98.42 smd: 1(119,0) 2(-119,0)
  silkscreen extent -184,-76 205,75, body extent -118,-63 118,63, height 110
CASE-D_7343 [mil]
  rect 110.2x118.5 smd: 1(118.11,0) 2(-118.11,0)
  silkscreen extent -146,-91 146,91, body extent -144,-85 144,85, height 121
CONN-TH_XY2500R-A-5.00-2P [mm]
  rect 2.5x2.5 hole 1.6: 1(-2.5,0)
  round 2.5 hole 1.6: 2(2.5,0)
  silkscreen extent -5.08,-10 5.08,2, body extent -5,-10 5,2, height 8.4
CONN-TH_XY2500R-A-5.00-3P [mm]
  rect 2.5x2.5 hole 1.6: 1(-5,0)
  round 2.5 hole 1.6: 2(0,0) 3(5,0)
  silkscreen extent -7.54,-10 7.7,2, body extent -7.5,-10 7.5,2, height 8.4
CONN-TH_XY2500R-A-5.00-4P [mm]
  rect 2.5x2.5 hole 1.6: 1(-7.5,0)
  round 2.5 hole 1.6: 2(-2.5,0) 3(2.5,0) 4(7.5,0)
  silkscreen extent -10.04,-10 10,2, body extent -10,-10 10,2, height 8.4
CONN-TH_XY2500R-A-5.00-6P [mm]
  rect 2.5x2.5 hole 1.6: 1(-12.5,0)
  round 2.5 hole 1.6: 2(-7.5,0) 3(-2.5,0) 4(2.5,0) 5(7.5,0) 6(12.5,0)
  silkscreen extent -15.04,-10 15,2, body extent -15,-10 15,2, height 8.4
DSUB-TH_DS1037-09FNAKT74-0CC [mm]
  rect 1.575x1.575 hole 1: 1(-1.42,5.52)
  round 1.575 hole 1: 2(-1.42,2.76) 3(-1.42,0) 4(-1.42,-2.76) 5(-1.42,-5.52) 6(1.42,4.14) 7(1.42,1.38) 8(1.42,-1.38) 9(1.42,-4.14)
  round 5 hole 3.25: 10(0,12.5) 11(0,-12.5)
  silkscreen extent -3,-15.4 15.5,15.4, body extent -2.75,-15.45 15.75,15.45, height 12.31
FILTER-SMD_4P-L2.0-W1.2-BL_DLW21H [mm]
  rect 0.4x0.75 smd: 1(-0.4,-0.925) 2(-0.4,0.925) 3(0.4,0.925) 4(0.4,-0.925)
  silkscreen extent -0.85,-1 0.85,1, body extent -0.6,-1.01 0.6,1.01, height 1.2
FUSE-SMD_L6.1-W2.7 [mm]
  rect 2.91x2.905 smd paste-100 mask+0.051: 1(-2.33,0) 2(2.33,0)
  silkscreen extent -4.06,-1.78 4.06,1.78, body extent -3.05,-1.35 3.05,1.35, height 2.7
HVQFN-24_L3.0-W3.0-P0.40-TL-EP1.9 [mm]
  oval 0.525x0.2 smd paste-100 mask+0.051: 1(-1.437,0.9) 2(-1.437,0.5) 4(-1.437,-0.5) 5(-1.437,-0.9) 13(1.437,-0.9) 14(1.437,-0.5) 16(1.437,0.5) 17(1.437,0.9)
  rect 0.525x0.4 smd paste-100 mask+0.051: 3(-1.437,0) 15(1.437,0)
  rect 0.25x0.25 smd paste-100 mask+0.051: 6(-1.325,-1.325) 12(1.325,-1.325) 18(1.325,1.325) 24(-1.325,1.325)
  oval 0.2x0.525 smd paste-100 mask+0.051: 7(-0.9,-1.437) 8(-0.5,-1.437) 10(0.5,-1.437) 11(0.9,-1.437) 19(0.9,1.437) 20(0.5,1.437) 22(-0.5,1.437) 23(-0.9,1.437)
  rect 0.4x0.525 smd paste-100 mask+0.051: 9(0,-1.437) 21(0,1.437)
  rect 1.9x1.9 smd paste-100 mask+0.051: 25(0,0)
  silkscreen extent -1.84,-1.6 1.6,1.6, body extent -1.51,-1.51 1.51,1.51, height 1
IND-SMD_L5.4-W5.2_PSPMAA0503 [mm]
  rect 2.2x2.5 smd: 1(-2.15,0) 2(2.15,0)
  silkscreen extent -2.7,-2.6 2.7,2.6, body extent -2.7,-2.6 2.7,2.6, height 3
IND-SMD_L5.4-W5.2_SLO0530H6R8MTT [mm]
  rect 1.924x2.32 smd: 1(2.578,0) 2(-2.578,0)
  silkscreen extent -2.78,-2.68 2.78,2.68, body extent -2.7,-2.6 2.7,2.6, height 3.01
L0806 [mm]
  rect 1.2x1.8 smd paste+0 mask+0.051: 1(-1,0) 2(1,0)
  silkscreen extent -1.9,-1.2 1.9,1.2, body extent -0.95,-0.78 1.05,0.82, height 1
L_0603 [mm]
  rrect25% 0.8x0.95 smd mask+0: 1(-0.819,-0.019) 2(0.831,-0.019)
  silkscreen extent -1.47,-0.75 1.49,0.71, body extent -0.79,-0.42 0.81,0.38, height 0.45
LED0805-RD [mm]
  rect 1x1.25 smd: 1(-1.1,0) 2(1.1,0)
  silkscreen extent -2.1,-0.95 1.98,0.96, body extent -1.01,-0.62 1.01,0.62, height 1.01
LED0805-RD_GREEN [mm]
  rect 1x1.25 smd: 1(-1.1,0) 2(1.1,0)
  silkscreen extent -2.1,-0.95 1.98,0.96, body extent -1.01,-0.62 1.01,0.62, height 1.01
LED0805-RD_RED [mm]
  rect 1x1.25 smd: 1(-1.1,0) 2(1.1,0)
  silkscreen extent -2.1,-0.95 1.98,0.96, body extent -1.01,-0.62 1.01,0.62, height 1.01
LL-34_L3.5-W1.5-RD [mm]
  rect 1.1x1.7 smd: 1(-1.7,0) 2(1.7,0)
  silkscreen extent -0.9,-0.8 0.9,0.8, body extent -1.7,-0.74 1.7,0.74, height 1.5
LQFP-176_L24.0-W24.0-P0.50-LS26.0-BL [mm]
  oval 0.28x1.8 smd: 1(-10.75,-12.55) 2(-10.25,-12.55) 3(-9.75,-12.55) 4(-9.25,-12.55) 5(-8.75,-12.55) 6(-8.25,-12.55) 7(-7.75,-12.55) 8(-7.25,-12.55) 9(-6.75,-12.55) 10(-6.25,-12.55) 11(-5.75,-12.55) 12(-5.25,-12.55) 13(-4.75,-12.55) 14(-4.25,-12.55) 15(-3.75,-12.55) 16(-3.25,-12.55) 17(-2.75,-12.55) 18(-2.25,-12.55) 19(-1.75,-12.55) 20(-1.25,-12.55) 21(-0.75,-12.55) 22(-0.25,-12.55) 23(0.25,-12.55) 24(0.75,-12.55) 25(1.25,-12.55) 26(1.75,-12.55) 27(2.25,-12.55) 28(2.75,-12.55) 29(3.25,-12.55) 30(3.75,-12.55) 31(4.25,-12.55) 32(4.75,-12.55) 33(5.25,-12.55) 34(5.75,-12.55) 35(6.25,-12.55) 36(6.75,-12.55) 37(7.25,-12.55) 38(7.75,-12.55) 39(8.25,-12.55) 40(8.75,-12.55) 41(9.25,-12.55) 42(9.75,-12.55) 43(10.25,-12.55) 44(10.75,-12.55) 89(10.75,12.55) 90(10.25,12.55) 91(9.75,12.55) 92(9.25,12.55) 93(8.75,12.55) 94(8.25,12.55) 95(7.75,12.55) 96(7.25,12.55) 97(6.75,12.55) 98(6.25,12.55) 99(5.75,12.55) 100(5.25,12.55) 101(4.75,12.55) 102(4.25,12.55) 103(3.75,12.55) 104(3.25,12.55) 105(2.75,12.55) 106(2.25,12.55) 107(1.75,12.55) 108(1.25,12.55) 109(0.75,12.55) 110(0.25,12.55) 111(-0.25,12.55) 112(-0.75,12.55) 113(-1.25,12.55) 114(-1.75,12.55) 115(-2.25,12.55) 116(-2.75,12.55) 117(-3.25,12.55) 118(-3.75,12.55) 119(-4.25,12.55) 120(-4.75,12.55) 121(-5.25,12.55) 122(-5.75,12.55) 123(-6.25,12.55) 124(-6.75,12.55) 125(-7.25,12.55) 126(-7.75,12.55) 127(-8.25,12.55) 128(-8.75,12.55) 129(-9.25,12.55) 130(-9.75,12.55) 131(-10.25,12.55) 132(-10.75,12.55)
  oval 1.8x0.28 smd: 45(12.55,-10.75) 46(12.55,-10.25) 47(12.55,-9.75) 48(12.55,-9.25) 49(12.55,-8.75) 50(12.55,-8.25) 51(12.55,-7.75) 52(12.55,-7.25) 53(12.55,-6.75) 54(12.55,-6.25) 55(12.55,-5.75) 56(12.55,-5.25) 57(12.55,-4.75) 58(12.55,-4.25) 59(12.55,-3.75) 60(12.55,-3.25) 61(12.55,-2.75) 62(12.55,-2.25) 63(12.55,-1.75) 64(12.55,-1.25) 65(12.55,-0.75) 66(12.55,-0.25) 67(12.55,0.25) 68(12.55,0.75) 69(12.55,1.25) 70(12.55,1.75) 71(12.55,2.25) 72(12.55,2.75) 73(12.55,3.25) 74(12.55,3.75) 75(12.55,4.25) 76(12.55,4.75) 77(12.55,5.25) 78(12.55,5.75) 79(12.55,6.25) 80(12.55,6.75) 81(12.55,7.25) 82(12.55,7.75) 83(12.55,8.25) 84(12.55,8.75) 85(12.55,9.25) 86(12.55,9.75) 87(12.55,10.25) 88(12.55,10.75) 133(-12.55,10.75) 134(-12.55,10.25) 135(-12.55,9.75) 136(-12.55,9.25) 137(-12.55,8.75) 138(-12.55,8.25) 139(-12.55,7.75) 140(-12.55,7.25) 141(-12.55,6.75) 142(-12.55,6.25) 143(-12.55,5.75) 144(-12.55,5.25) 145(-12.55,4.75) 146(-12.55,4.25) 147(-12.55,3.75) 148(-12.55,3.25) 149(-12.55,2.75) 150(-12.55,2.25) 151(-12.55,1.75) 152(-12.55,1.25) 153(-12.55,0.75) 154(-12.55,0.25) 155(-12.55,-0.25) 156(-12.55,-0.75) 157(-12.55,-1.25) 158(-12.55,-1.75) 159(-12.55,-2.25) 160(-12.55,-2.75) 161(-12.55,-3.25) 162(-12.55,-3.75) 163(-12.55,-4.25) 164(-12.55,-4.75) 165(-12.55,-5.25) 166(-12.55,-5.75) 167(-12.55,-6.25) 168(-12.55,-6.75) 169(-12.55,-7.25) 170(-12.55,-7.75) 171(-12.55,-8.25) 172(-12.55,-8.75) 173(-12.55,-9.25) 174(-12.55,-9.75) 175(-12.55,-10.25) 176(-12.55,-10.75)
  silkscreen extent -11.57,-13.03 11.25,11.25, body extent -13,-13 13,13, height 1.5
MBS_L4.7-W4.0-P2.50-LS7.0-TL [mm]
  rect 2.265x0.98 smd: 1(-2.832,1.25) 2(-2.832,-1.25) 3(2.832,-1.25) 4(2.832,1.25)
  silkscreen extent -1.5,-2.43 1.44,2.43, body extent -3.47,-2.39 3.53,2.31, height 2.6
MountingHole_3.2mm_M3_Pad_Via [mm]
  round 0.8 hole 0.5 paste-2539.97 mask+0: 1(-2.4,0) 1(-1.697,1.697) 1(-1.697,-1.697) 1(0,2.4) 1(0,-2.4) 1(1.697,1.697) 1(1.697,-1.697) 1(2.4,0)
  round 6.4 hole 3.2 paste-2539.97 mask+0: 1(0,0)
OLED-SMD_30P-0.96OLED [mm]
  rect 0.27x3 smd paste+0 mask+0.05: 1(-10.022,-5.971) 2(-9.317,-5.969) 3(-8.617,-5.969) 4(-7.917,-5.969) 5(-7.217,-5.969) 6(-6.517,-5.969) 7(-5.817,-5.969) 8(-5.117,-5.969) 9(-4.417,-5.969) 10(-3.717,-5.969) 11(-3.017,-5.969) 12(-2.317,-5.969) 13(-1.617,-5.969) 14(-0.917,-5.969) 15(-0.217,-5.969) 16(0.483,-5.969) 17(1.183,-5.969) 18(1.883,-5.969) 19(2.583,-5.969) 20(3.283,-5.969) 21(3.983,-5.969) 22(4.683,-5.969) 23(5.383,-5.969) 24(6.083,-5.969) 25(6.783,-5.969) 26(7.483,-5.969) 27(8.183,-5.969) 28(8.878,-5.968) 29(9.577,-5.967) 30(10.276,-5.967)
  silkscreen extent -13.3,-12.7 13.41,9.03, body extent -13.22,-12.95 13.48,10.38, height 2.8
OPTO-SMD_PS2911-1-F3-AX [mm]
  rect 0.56x0.785 smd: 1(-0.635,-2.392) 2(0.635,-2.392) 3(0.635,2.392) 4(-0.635,2.392)
  silkscreen extent -1.52,-2.69 1.33,2.38, body extent -1.25,-2.5 1.25,2.5, height 2.1
OSC-SMD_2P-L3.2-W1.5 [mm]
  rect 1.15x1.7 smd: 1(-1.325,0) 2(1.325,0)
  silkscreen extent -2.39,-1.08 2.13,1.37, body extent -1.56,-0.75 1.64,0.75, height 0.73
OSC-SMD_4P-L2.5-W2.0-BL [mm]
  rect 1.2x1.1 smd: 1(-0.95,-0.75) 2(0.95,-0.75) 3(0.95,0.75) 4(-0.95,0.75)
  silkscreen extent -2.01,-1.76 1.78,1.53, body extent -1.25,-1 1.25,1, height 0.57
PDFN-8_L5.8-W5.0-P1.27-LS6.1-BL [mm]
  rect 0.7x1.2 smd paste-100 mask+0.05: 1(-1.905,-2.9) 2(-0.635,-2.9) 3(0.635,-2.9) 4(1.905,-2.9) 5(1.9,2.9) 6(0.64,2.9) 7(-0.63,2.9) 8(-1.9,2.9)
  rect 4.6x3.8 smd paste-100 mask+0.05: 9(0,0.54)
  silkscreen extent -2.95,-3.57 2.58,2.97, body extent -2.55,-3.05 2.55,3.05, height 1.01
QFN-16L_L3.5-W1.2-P0.40_EMIF06-MSD02N16 [mm]
  rect 0.2x0.4 smd paste-100 mask+0.05: 1(-1.4,-0.6) 2(-1,-0.6) 3(-0.6,-0.6) 4(-0.2,-0.6) 5(0.2,-0.6) 6(0.6,-0.6) 7(1,-0.6) 8(1.4,-0.6) 10(1.4,0.6) 11(1,0.6) 12(0.6,0.6) 13(0.2,0.6) 14(-0.2,0.6) 15(-0.6,0.6) 16(-1,0.6) 17(-1.4,0.6)
  rect 0.25x0.4 smd paste-100 mask+0.05: 9(1.75,0) 18(-1.75,0)
  rect 2.8x0.3 smd paste-100 mask+0.05: 19(0,0)
  silkscreen extent -1.75,-1.03 1.75,0.6, body extent -1.69,-0.57 1.81,0.63, height 0.53
R2010 [mm]
  rect 1.283x2.7 smd paste-100 mask+0.051: 1(-2.391,0) 2(2.391,0)
  silkscreen extent -3.26,-1.58 3.26,1.58, body extent -2.44,-1.27 2.56,1.23, height 0.61
R2512 [mil]
  rect 50.49x136.06 smd paste-3937.01 mask+2: 1(-120.72,0) 2(120.72,0)
  silkscreen extent -155,-77 155,77, body extent -100,-63 101,63, height 24
R_0402 [mm]
  rrect25% 0.54x0.64 smd mask+0: 1(-0.51,-0.005) 2(0.51,-0.005)
  silkscreen extent -0.93,-0.48 0.93,0.46, body extent -0.5,-0.26 0.5,0.24, height 0.35
R_0603 [mm]
  rrect25% 0.8x0.95 smd mask+0: 1(-0.819,-0.019) 2(0.831,-0.019)
  silkscreen extent -1.47,-0.75 1.49,0.71, body extent -0.79,-0.42 0.81,0.38, height 0.45
R_0805 [mm]
  rrect24% 1.025x1.4 smd mask+0: 1(-0.925,-0.028) 2(0.9,-0.028)
  silkscreen extent -1.69,-0.98 1.67,0.92, body extent -1.01,-0.63 0.99,0.57, height 0.45
R_1206 [mm]
  rrect22% 1.125x1.75 smd mask+0: 1(-1.467,0.014) 2(1.458,0.014)
  silkscreen extent -2.28,-1.11 2.28,1.13, body extent -1.6,-0.79 1.6,0.81, height 0.55
RELAY-TH_G7SA-2A2B [mm]
  round 2.3 hole 1.4 paste-2539.97 mask+0.05: 0(-17.78,-5.08) 1(-17.78,5.08) 11(-3.81,-5.08) 12(1.27,-5.08) 21(-3.81,5.08) 22(1.27,5.08) 33(12.7,-5.08) 34(17.78,-5.08) 43(12.7,5.08) 44(17.78,5.08)
  silkscreen extent -19.6,-6.5 20.4,6.5, body extent -19.56,-6.48 20.32,6.48, height 24
RELAY-TH_SRD-XXVDC-XL-C [mil]
  round 110 hole 60: 1(-200.79,-236.22) 2(279.52,-236.2) 3(279.53,236.2) 4(-200.79,236.22) 5(-279.53,0)
  silkscreen extent -342,-307 413,307, body extent -341,-309 415,313, height 622
RJ45-TH_R-RJ45R08P-C000 [mil]
  round 60 hole 36: 1(140.55,-129.72) 2(100.39,-59.65) 3(60.23,-129.72) 4(20.08,-59.65) 5(-20.08,-129.72) 6(-60.24,-59.65) 7(-100.39,-129.72) 8(-140.55,-59.65) 9(-270.08,129.72) 10(-179.92,129.72) 11(179.92,129.72) 12(270.08,129.72)
  round 98.42 hole 74.8: 13(320.08,-89.57) 14(-320.08,-89.57)
  Keep-Out Layer board cut-out: -231.05,-167.26 -219.23,-172.16 -208.59,-179.27 -199.54,-188.31 -192.43,-198.95 -187.54,-210.78 -185.04,-223.33 -185.04,-236.12 -187.54,-248.67 -192.43,-260.5 -199.54,-271.14 -208.59,-280.18 -219.23,-287.29 -231.05,-292.19 -243.6,-294.69 -256.4,-294.69 -268.95,-292.19 -280.77,-287.29 -291.41,-280.18 -300.46,-271.14 -307.57,-260.5 -312.46,-248.67 -314.96,-236.12 -314.96,-223.33 -312.46,-210.78 -307.57,-198.95 -300.46,-188.31 -291.41,-179.27 -280.77,-172.16 -268.95,-167.26 -256.4,-164.76 -243.6,-164.76
  Keep-Out Layer board cut-out: 268.95,-167.26 280.77,-172.16 291.41,-179.27 300.46,-188.31 307.57,-198.95 312.46,-210.78 314.96,-223.33 314.96,-236.12 312.46,-248.67 307.57,-260.5 300.46,-271.14 291.41,-280.18 280.77,-287.29 268.95,-292.19 256.4,-294.69 243.6,-294.69 231.05,-292.19 219.23,-287.29 208.59,-280.18 199.54,-271.14 192.43,-260.5 187.54,-248.67 185.04,-236.12 185.04,-223.33 187.54,-210.78 192.43,-198.95 199.54,-188.31 208.59,-179.27 219.23,-172.16 231.05,-167.26 243.6,-164.76 256.4,-164.76
  Keep-Out Layer circle w0.2: c-250,-229.73 r64.96
  Keep-Out Layer circle w0.2: c250,-229.73 r64.96
  Keep-Out Layer region: -250,-164.76 -243.6,-164.76 -231.05,-167.26 -219.23,-172.16 -208.59,-179.27 -199.54,-188.31 -192.43,-198.95 -187.54,-210.78 -185.04,-223.33 -185.04,-236.12 -187.54,-248.67 -192.43,-260.5 -199.54,-271.14 -208.59,-280.18 -219.23,-287.29 -231.05,-292.19 -243.6,-294.69 -250,-294.69 -256.4,-294.69 -268.95,-292.19 -280.77,-287.29 -291.41,-280.18 -300.46,-271.14 -307.57,-260.5 -312.46,-248.67 -314.96,-236.12 -314.96,-223.33 -312.46,-210.78 -307.57,-198.95 -300.46,-188.31 -291.41,-179.27 -280.77,-172.16 -268.95,-167.26 -256.4,-164.76 -250,-164.76 -250,-164.76
  Keep-Out Layer region: 250,-164.76 256.4,-164.76 268.95,-167.26 280.77,-172.16 291.41,-179.27 300.46,-188.31 307.57,-198.95 312.46,-210.78 314.96,-223.33 314.96,-236.12 312.46,-248.67 307.57,-260.5 300.46,-271.14 291.41,-280.18 280.77,-287.29 268.95,-292.19 256.4,-294.69 250,-294.69 243.6,-294.69 231.05,-292.19 219.23,-287.29 208.59,-280.18 199.54,-271.14 192.43,-260.5 187.54,-248.67 185.04,-236.12 185.04,-223.33 187.54,-210.78 192.43,-198.95 199.54,-188.31 208.59,-179.27 219.23,-172.16 231.05,-167.26 243.6,-164.76 250,-164.76 250,-164.76
  silkscreen extent -320,-445 320,180, body extent -324,-446 324,186, height 504
SC-70-6_L2.2-W1.3-P0.65-LS2.1-BR [mm]
  rect 0.6x0.42 smd: 1(0.95,-0.65) 2(0.95,0) 3(0.95,0.65) 4(-0.95,0.65) 5(-0.95,0) 6(-0.95,-0.65)
  silkscreen extent -0.7,-1.34 1.22,1.1, body extent -1.08,-0.97 1.02,1.03, height 1.1
SD-SMD_DM3AT-SF-PEJM5 [mm]
  rect 0.7x1.2 smd: 1(2.85,7.55) 2(1.75,7.55) 3(0.65,7.55) 4(-0.45,7.55) 5(-1.55,7.55) 6(-2.65,7.55) 7(-3.75,7.55) 8(-4.85,7.55) 9(-5.8,7.55)
  rect 1x1.2 smd: 10(-6.75,3.25) 14(4.4,7.55)
  rect 1x0.8 smd: 11(-6.75,-2.95)
  rect 1x2.8 smd: 12(-6.75,-7.1)
  rect 1.3x1.9 smd: 13(6.75,-7.55)
  silkscreen extent -7.44,-8.71 7.68,7.55, body extent -6.85,-8.31 7,7.65, height 1.89
SMA_L4.3-W2.6-LS5.2-RD [mm]
  rect 2x2 smd: 1(-2.2,0) 2(2.2,0)
  silkscreen extent -2.98,-1.5 2.6,1.5, body extent -2.32,-1.35 2.38,1.25, height 2.1
SMA_L4.4-W2.5-LS5.2-R-RD [mm]
  rect 1.6x1.539 smd: 1(2.104,0) 2(-2.104,0)
  silkscreen extent -3.03,-1.43 2.65,1.43, body extent -2.38,-1.3 2.32,1.3, height 2.1
SMC_L6.9-W5.9-LS7.9-RD [mm]
  rect 2.7x3.3 smd: 1(-3.686,0) 2(3.686,0)
  silkscreen extent -4.36,-3.1 3.98,3.1, body extent -4,-3 4,3, height 2.1
SOD-80_L3.5-W1.5-RD [mm]
  rect 1.44x1.62 smd: 1(-1.765,0) 2(1.765,0)
  silkscreen extent -0.84,-0.83 0.84,0.83, body extent -1.65,-0.79 1.65,0.79, height 1.6
SOD-123_L2.7-W1.6-LS3.7-RD [mm]
  rect 0.91x1.22 smd: 1(-1.635,0) 2(1.635,0)
  silkscreen extent -1.6,-1 1.38,1, body extent -1.85,-0.8 1.85,0.8, height 1.27
SOD-123_L2.8-W1.8-LS3.7-RD [mm]
  rect 0.95x1.15 smd: 1(-1.692,0) 2(1.692,0)
  silkscreen extent -1.58,-0.87 1.41,0.87, body extent -1.84,-0.8 1.84,0.8, height 1.22
SOD-323_L1.8-W1.3-LS2.5-RD [mm]
  rect 1x0.75 smd: 1(-1.173,0) 2(1.173,0)
  silkscreen extent -1.08,-0.8 0.9,0.8, body extent -1.33,-0.65 1.33,0.65, height 0.95
SOD-523F_L1.2-W0.8-LS1.7-RD [mil]
  rect 24x19 smd: 1(-28,0.2) 2(28,-0.2)
  silkscreen extent -29,-19 26,19, body extent -32,-16 31,16, height 24
SOIC-8_L5.0-W4.0-P1.27-LS6.0-BL [mil]
  oval 22.38x76.78 smd: 1(-75,-106.5) 2(-25,-106.5) 3(25,-106.5) 4(75,-106.5) 5(75,106.5) 6(25,106.5) 7(-25,106.5) 8(-75,106.5)
  silkscreen extent -98,-59 98,59, body extent -95,-118 95,118, height 68
SOIC-20_L13.0-W7.6-P1.27-LS10.3-BL [mm]
  oval 0.595x2.36 smd: 1(-5.715,-4.73) 2(-4.445,-4.73) 3(-3.175,-4.73) 4(-1.905,-4.73) 5(-0.635,-4.73) 6(0.635,-4.73) 7(1.905,-4.73) 8(3.175,-4.73) 9(4.445,-4.73) 10(5.715,-4.73) 11(5.715,4.73) 12(4.445,4.73) 13(3.175,4.73) 14(1.905,4.73) 15(0.635,4.73) 16(-0.635,4.73) 17(-1.905,4.73) 18(-3.175,4.73) 19(-4.445,4.73) 20(-5.715,4.73)
  silkscreen extent -6.61,-4.88 6.48,3.32, body extent -6.4,-5.2 6.4,5.2, height 2.85
SON-6_L1.4-W1.0-P0.50-TL_USBULC6-2M6 [mm]
  rect 0.25x0.525 smd paste+0 mask+0.05: 1(0.5,0.362) 2(0,0.362) 3(-0.5,0.362) 4(-0.5,-0.362) 5(0,-0.362) 6(0.5,-0.362)
  silkscreen extent -0.8,-0.6 0.8,1, body extent -0.66,-0.52 0.74,0.48, height 0.41
SOP-4_L6.5-W4.6-P2.54-LS10.0 [mm]
  rect 1.8x2.5 smd paste+0 mask+0.051: 1(-1.27,-4.9) 2(1.27,-4.9) 3(1.27,4.9) 4(-1.27,4.9)
  silkscreen extent -2.31,-3.18 2.29,3.32, body extent -2.28,-4.99 2.32,5.01, height 3.6
SOT-23-3_L2.9-W1.3-P0.95-LS2.4-BR [mm]
  rect 1.25x0.7 smd: 1(1,-0.95) 2(1,0.95) 3(-1,0)
  silkscreen extent -0.73,-1.53 0.73,1.53, body extent -1.25,-1.45 1.25,1.45, height 1.05
SOT-23-3_L2.9-W1.3-P1.90-LS2.4-BR [mm]
  rect 1.25x0.7 smd: 1(1,-0.95) 2(1,0.95) 3(-1,0)
  silkscreen extent -0.73,-1.53 0.73,1.53, body extent -1.13,-1.45 1.38,1.45, height 1.05
SOT-23-3_L2.9-W1.6-P1.90-LS2.8-BR [mm]
  rect 1.07x0.6 smd: 1(1.235,-0.95) 2(1.235,0.95) 3(-1.235,0)
  silkscreen extent -0.88,-1.54 0.88,1.54, body extent -1.25,-1.45 1.25,1.45, height 1.05
SOT-23-5_L3.0-W1.7-P0.95-LS2.8-BL [mm]
  rect 0.49x1.157 smd: 1(-0.95,-1.154) 2(0,-1.154) 3(0.95,-1.154)
  rect 0.49x1.175 smd: 4(0.95,1.154) 5(-0.95,1.154)
  silkscreen extent -1.8,-1.29 1.53,0.85, body extent -1.45,-1.51 1.45,1.51, height 1.25
SOT-23-6_L2.9-W1.6-P0.95-LS2.8-BR [mm]
  rect 1.1x0.6 smd paste+0 mask+0.051: 1(1.35,-0.95) 2(1.35,0) 3(1.35,0.95) 4(-1.35,0.95) 5(-1.35,0) 6(-1.35,-0.95)
  silkscreen extent -0.9,-1.78 1.52,1.55, body extent -1.41,-1.45 1.41,1.45, height 1.65
SOT-23_L2.9-W1.3-P1.90-LS2.4-BR [mm]
  rect 1x0.8 smd: 1(1.15,-0.95) 2(1.15,0.95) 3(-1.15,0)
  silkscreen extent -0.7,-1.5 0.7,1.5, body extent -1.25,-1.45 1.25,1.45, height 1.05
SOT-223-3_L6.5-W3.4-P2.30-LS7.0-BR [mm]
  rect 2.5x1.1 smd: 1(2.97,-2.3) 2(2.97,0) 3(2.97,2.3)
  rect 2.34x3.6 smd: 4(-2.97,0)
  silkscreen extent -1.57,-3.33 1.37,3.33, body extent -3.65,-3.25 3.45,3.25, height 1.75
SSOP-16_L4.9-W3.9-P0.64-LS6.0-BL [mil]
  oval 14x71.45 smd: 1(-87.5,-104.52) 2(-62.5,-104.52) 3(-37.5,-104.52) 4(-12.5,-104.52) 5(12.5,-104.52) 6(37.5,-104.52) 7(62.5,-104.52) 8(87.5,-104.52) 9(87.5,104.52) 10(62.5,104.52) 11(37.5,104.52) 12(12.5,104.52) 13(-12.5,104.52) 14(-37.5,104.52) 15(-62.5,104.52) 16(-87.5,104.52)
  silkscreen extent -118,-110 100,60, body extent -96,-120 96,120, height 70
SW-SMD_2P-L3.5-W6.1-P2.54-LS9.8 [mm]
  rect 1.5x1.1 smd: 1(-4.5,0) 2(4.5,0)
  silkscreen extent -3.1,-1.27 3.1,1.27, body extent -4.65,-1.27 4.65,1.26, height 4.15
SW-SMD_4P-L5.1-W5.1-P3.70-LS6.5-TL_H1.5 [mm]
  rect 1x0.75 smd: 1(-3,1.875) 2(3,1.875) 3(-3,-1.875) 4(3,-1.875)
  silkscreen extent -2.55,-2.55 2.55,2.55, body extent -3.25,-2.6 3.25,2.6, height 1.55
SW-SMD_DSHP08TS-S [mm]
  oval 0.56x1.84 smd: 1(-4.445,-3.845) 2(-3.175,-3.845) 3(-1.905,-3.845) 4(-0.635,-3.845) 5(0.635,-3.845) 6(1.905,-3.845) 7(3.175,-3.845) 8(4.445,-3.845) 9(4.445,3.845) 10(3.175,3.845) 11(1.905,3.845) 12(0.635,3.845) 13(-0.635,3.845) 14(-1.905,3.845) 15(-3.175,3.845) 16(-4.445,3.845)
  silkscreen extent -5.97,-4 5.97,2.45, body extent -5.88,-4.25 5.88,4.25, height 2.35
TAG-CONNECT_TC2050-IDC-NL [mm]
  round 0.787 smd paste-1: 1(0,0) 2(0,-1.27) 3(0,-2.54) 4(0,-3.81) 5(0,-5.08) 6(1.27,-5.08) 7(1.27,-3.81) 8(1.27,-2.54) 9(1.27,-1.27) 10(1.27,0)
  round 0.991 hole 0.991 unplated: ""(-0.38,-6.35) ""(0.635,1.27) ""(1.65,-6.35)
  silkscreen extent -3.46,-8.76 4,3.68
TAG_TC2030-IDC-NL [mil]
  round 30.98 smd paste-39.37: 1(-50,-25) 2(-50,25) 3(0,-25) 4(0,25) 5(50,-25) 6(50,25)
  round 39.02 hole 39.02 unplated: ""(-100,0) ""(100,40) ""(100,-40)
  silkscreen extent -195,-154 195,120
TP [mm]
  round 1 smd: 1(0,0)
TSSOP-14_L5.0-W4.4-P0.65-LS6.4-BL [mm]
  rect 0.4x1.7 smd: 1(-1.95,-2.8) 2(-1.3,-2.8) 3(-0.65,-2.8) 4(0,-2.8) 5(0.65,-2.8) 6(1.3,-2.8) 7(1.95,-2.8) 8(1.95,2.8) 9(1.3,2.8) 10(0.65,2.8) 11(0,2.8) 12(-0.65,2.8) 13(-1.3,2.8) 14(-1.95,2.8)
  silkscreen extent -2.51,-1.74 2.5,1.74, body extent -2.5,-3.01 2.5,3.01, height 1.1
TYPE-C-SMD_TYPE-C-24P-QCHT [mm]
  oval 1x1.6 hole 0.6 slot 1.2 at 90 deg paste-2539.97 mask+0.05: 25(-4.49,-3.158) 25(-4.13,1.233) 25(4.13,1.233) 25(4.49,-3.158)
  rect 0.275x1.25 smd paste-100 mask+0.05: A1(-2.79,3.158) A2(-2.25,3.158) A3(-1.75,3.158) A4(-1.25,3.158) A5(-0.75,3.158) A6(-0.25,3.158) A7(0.25,3.158) A8(0.75,3.158) A9(1.25,3.158) A10(1.75,3.158) A11(2.25,3.158) A12(2.75,3.158)
  round 0.6 hole 0.4 paste-2539.97 mask+0.05: B1(2.8,1.832) B2(2.4,1.132) B3(1.6,1.133) B4(1.2,1.832) B5(0.8,1.133) B6(0.4,1.833) B7(-0.4,1.832) B8(-0.8,1.132) B9(-1.2,1.833) B10(-1.6,1.133) B11(-2.4,1.132) B12(-2.8,1.833)
  Keep-Out Layer board cut-out: 3.902,2.822 4.014,2.71 4.075,2.563 4.075,2.403 4.014,2.256 3.902,2.144 3.755,2.083 3.595,2.083 3.448,2.144 3.336,2.256 3.275,2.403 3.275,2.563 3.336,2.71 3.448,2.822 3.595,2.883 3.755,2.883
  Keep-Out Layer board cut-out: -3.448,2.822 -3.336,2.71 -3.275,2.563 -3.275,2.403 -3.336,2.256 -3.448,2.144 -3.595,2.083 -3.755,2.083 -3.902,2.144 -4.014,2.256 -4.075,2.403 -4.075,2.563 -4.014,2.71 -3.902,2.822 -3.755,2.883 -3.595,2.883
  Keep-Out Layer circle w0.005: c3.675,2.483 r0.4
  Keep-Out Layer circle w0.005: c-3.675,2.483 r0.4
  Keep-Out Layer region: 3.675,2.083 3.595,2.083 3.448,2.144 3.336,2.256 3.275,2.403 3.275,2.563 3.336,2.71 3.448,2.822 3.595,2.883 3.675,2.883 3.755,2.883 3.902,2.822 4.014,2.71 4.075,2.563 4.075,2.403 4.014,2.256 3.902,2.144 3.755,2.083 3.675,2.083 3.675,2.083
  Keep-Out Layer region: -3.675,2.083 -3.755,2.083 -3.902,2.144 -4.014,2.256 -4.075,2.403 -4.075,2.563 -4.014,2.71 -3.902,2.822 -3.755,2.883 -3.675,2.883 -3.595,2.883 -3.448,2.822 -3.336,2.71 -3.275,2.563 -3.275,2.403 -3.336,2.256 -3.448,2.144 -3.595,2.083 -3.675,2.083 -3.675,2.083
  silkscreen extent -4.46,-5.69 4.46,4.16, body extent -4.82,-5.69 4.82,4.16, height 3.21
USON-10_L2.5-W1.0-P0.50-BL [mm]
  rect 0.25x0.609 smd: 1(-1,-0.415) 2(-0.5,-0.415) 4(0.5,-0.415) 5(1,-0.415) 6(1,0.415) 7(0.5,0.415) 9(-0.5,0.415) 10(-1,0.415)
  rect 0.38x0.609 smd: 3(0,-0.415) 8(0,0.415)
  silkscreen extent -1.33,-1.12 1.33,0.58, body extent -1.25,-0.51 1.25,0.51, height 0.61
VSSOP-10_L3.0-W3.0-P0.50-LS4.9-BL [mm]
  rect 0.3x1.3 smd paste+0 mask+0.015: 1(-1,-2.35) 2(-0.5,-2.35) 3(0,-2.35) 4(0.5,-2.35) 5(1,-2.35)
  rect 0.3x1.3 smd paste+0 mask+0.051: 6(1,2.35) 7(0.5,2.35) 8(0,2.35) 9(-0.5,2.35) 10(-1,2.35)
  silkscreen extent -1.62,-2.08 1.52,1.54, body extent -1.51,-2.6 1.49,2.41, height 1.25
WIRELM-SMD_ESP32-S3-WROOM-1 [mm]
  rect 1.5x0.9 smd paste+0 mask+0.05: 1(-8.75,8.895) 2(-8.75,7.625) 3(-8.75,6.355) 4(-8.75,5.085) 5(-8.75,3.815) 6(-8.75,2.545) 7(-8.75,1.275) 8(-8.75,0.005) 9(-8.75,-1.265) 10(-8.75,-2.535) 11(-8.75,-3.805) 12(-8.75,-5.075) 13(-8.75,-6.345) 14(-8.75,-7.615) 27(8.75,-7.615) 28(8.75,-6.345) 29(8.75,-5.075) 30(8.75,-3.805) 31(8.75,-2.535) 32(8.75,-1.265) 33(8.75,0.005) 34(8.75,1.275) 35(8.75,2.545) 36(8.75,3.815) 37(8.75,5.085) 38(8.75,6.355) 39(8.75,7.625) 40(8.75,8.895)
  rect 0.9x1.5 smd paste+0 mask+0.05: 15(-6.985,-8.895) 16(-5.715,-8.895) 17(-4.445,-8.895) 18(-3.175,-8.895) 19(-1.905,-8.895) 20(-0.635,-8.895) 21(0.635,-8.895) 22(1.905,-8.895) 23(3.175,-8.895) 24(4.445,-8.895) 25(5.715,-8.895) 26(6.985,-8.865)
  rect 0.9x0.9 smd: 41(-2.9,1.175) 41(-2.9,2.575) 41(-2.9,-0.225) 41(-1.5,2.575) 41(-1.5,1.175) 41(-1.5,-0.225) 41(-0.1,2.575) 41(-0.1,1.175) 41(-0.1,-0.225)
  silkscreen extent -9,-9.14 9.02,16.39, body extent -9,-9.1 9,16.4, height 3.11
XFMR-SMD_H1102NLT [mil]
  rect 29.92x65.35 smd: 1(-175,-170) 2(-125,-170) 3(-75,-170) 4(-25,-170) 5(25,-170) 6(75,-170) 7(125,-170) 8(175,-170) 9(175,170) 10(125,170) 11(75,170) 12(25,170) 13(-25,170) 14(-75,170) 15(-125,170) 16(-175,170)
  silkscreen extent -250,-178 250,140, body extent -250,-188 250,188, height 258
XFMR_PA1134NL [mm]
  rect 2.54x1.27 smd: 1(6.605,3.75) 2(6.605,1.25) 3(6.605,-1.25) 4(6.605,-3.75) 5(-6.605,-3.75) 6(-6.605,-1.25) 7(-6.605,1.25) 8(-6.605,3.75)
  silkscreen extent -6.54,-6.54 8.6,6.54, body extent -7.87,-6.6 7.87,6.6, height 11.54